# Altium PCB {TEX137}_F2837x_controlCARD_R1.3_PCB_PADS.PcbDoc (part 1 of 6)
Units mm, origin at the board's own origin, x right, y up, seen from the top; angles counter-clockwise.
Board outline 105.77 x 51.09 mm, 10 copper layers (Primary Side, Inner Layer 2, Inner Layer 3, Inner Layer 4, Inner Layer 5, Inner Layer 6, Inner Layer 7, Inner Layer 8, Inner Layer 9, Secondary Side), stack 1.634 mm thick; 292 components, 317 nets, 1400 pads, 1032 vias.
Unrouted connection lines stored in the file: 106.
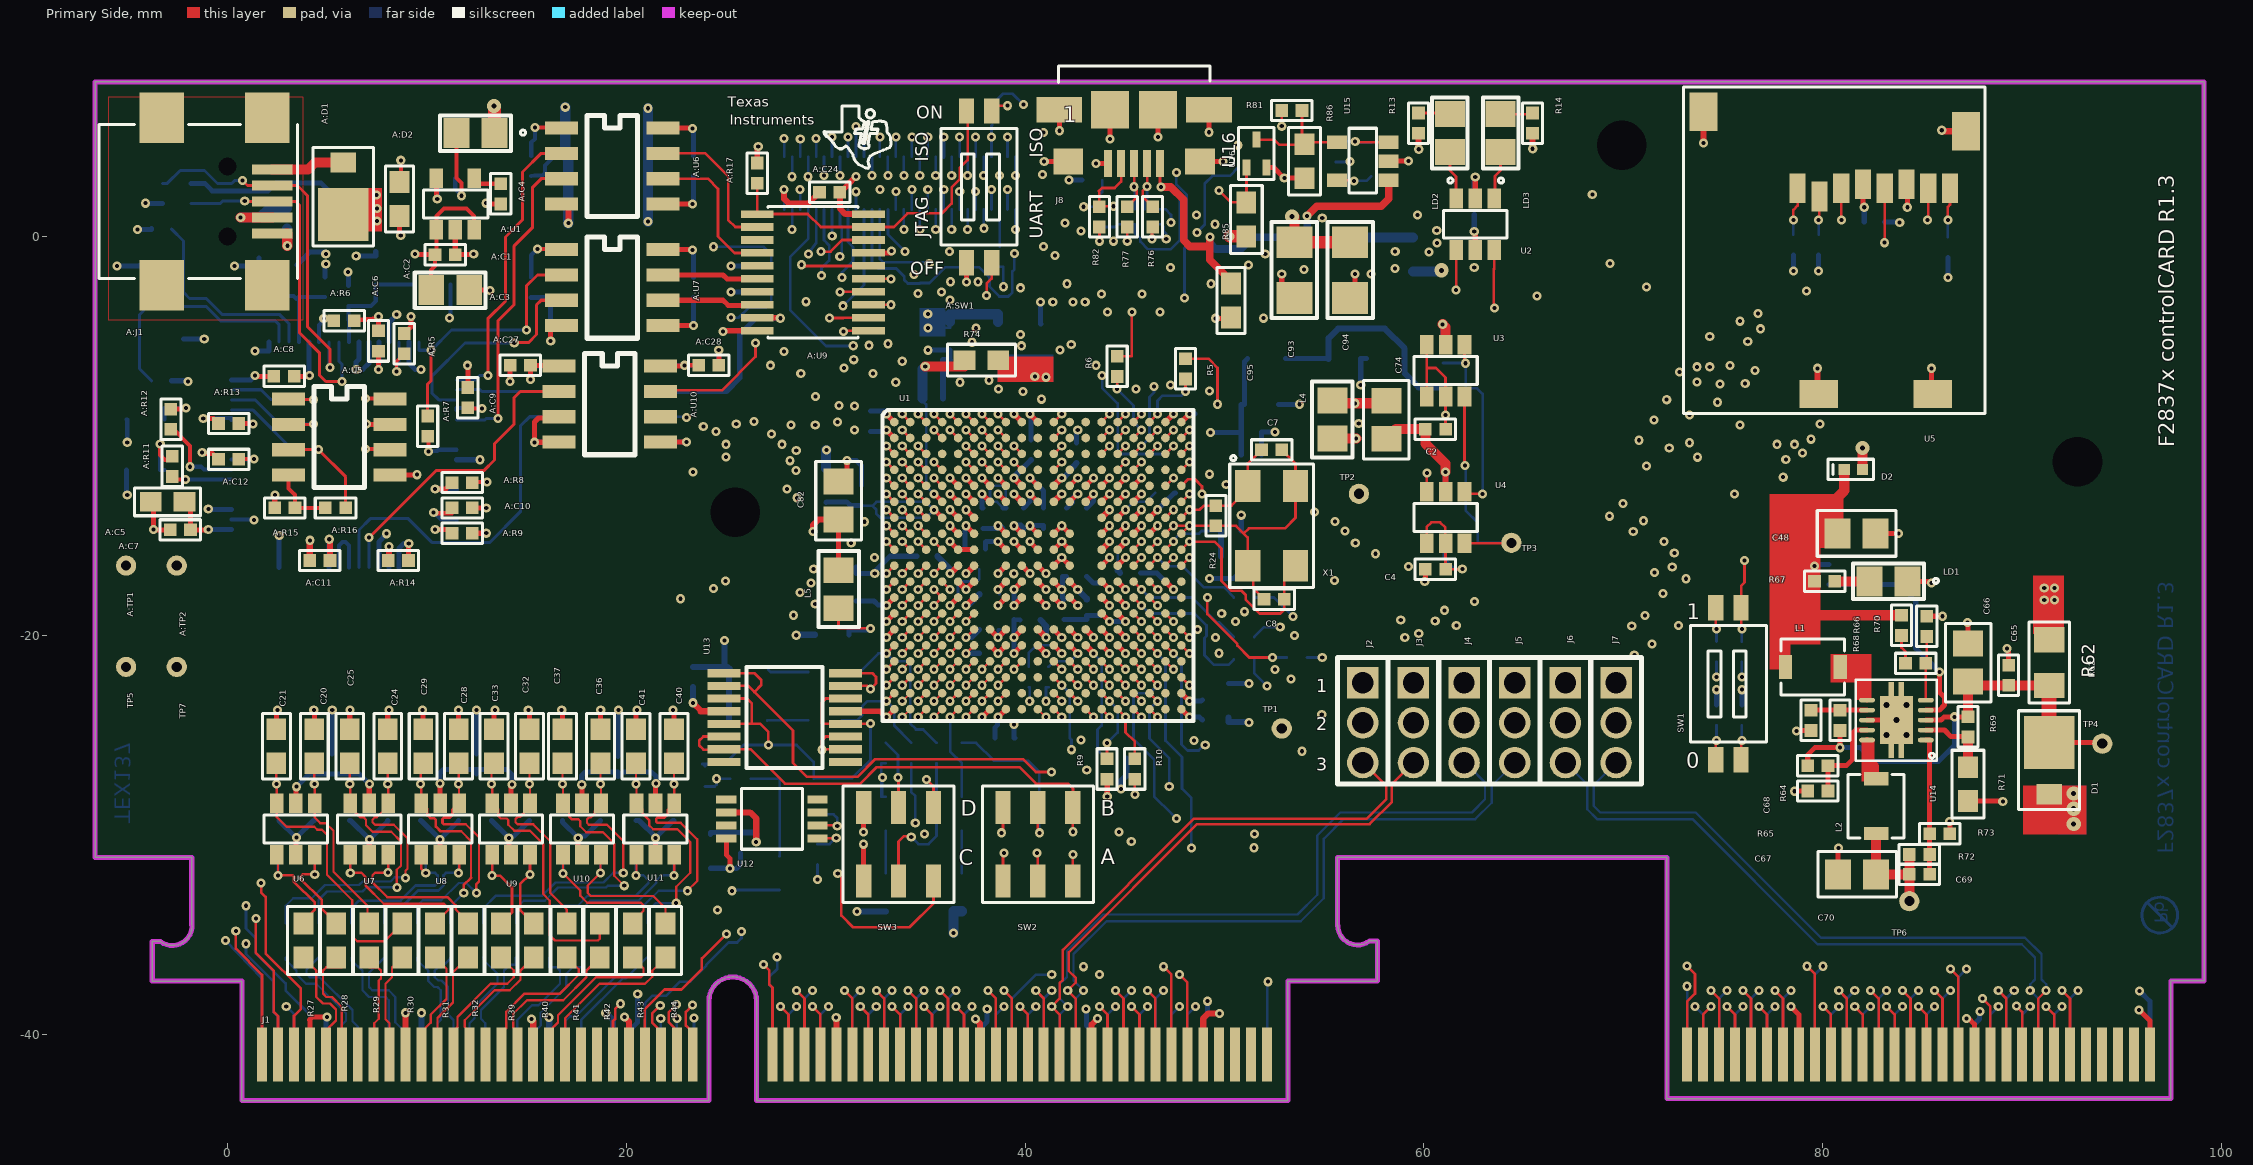
[diagram p0: Primary Side view]
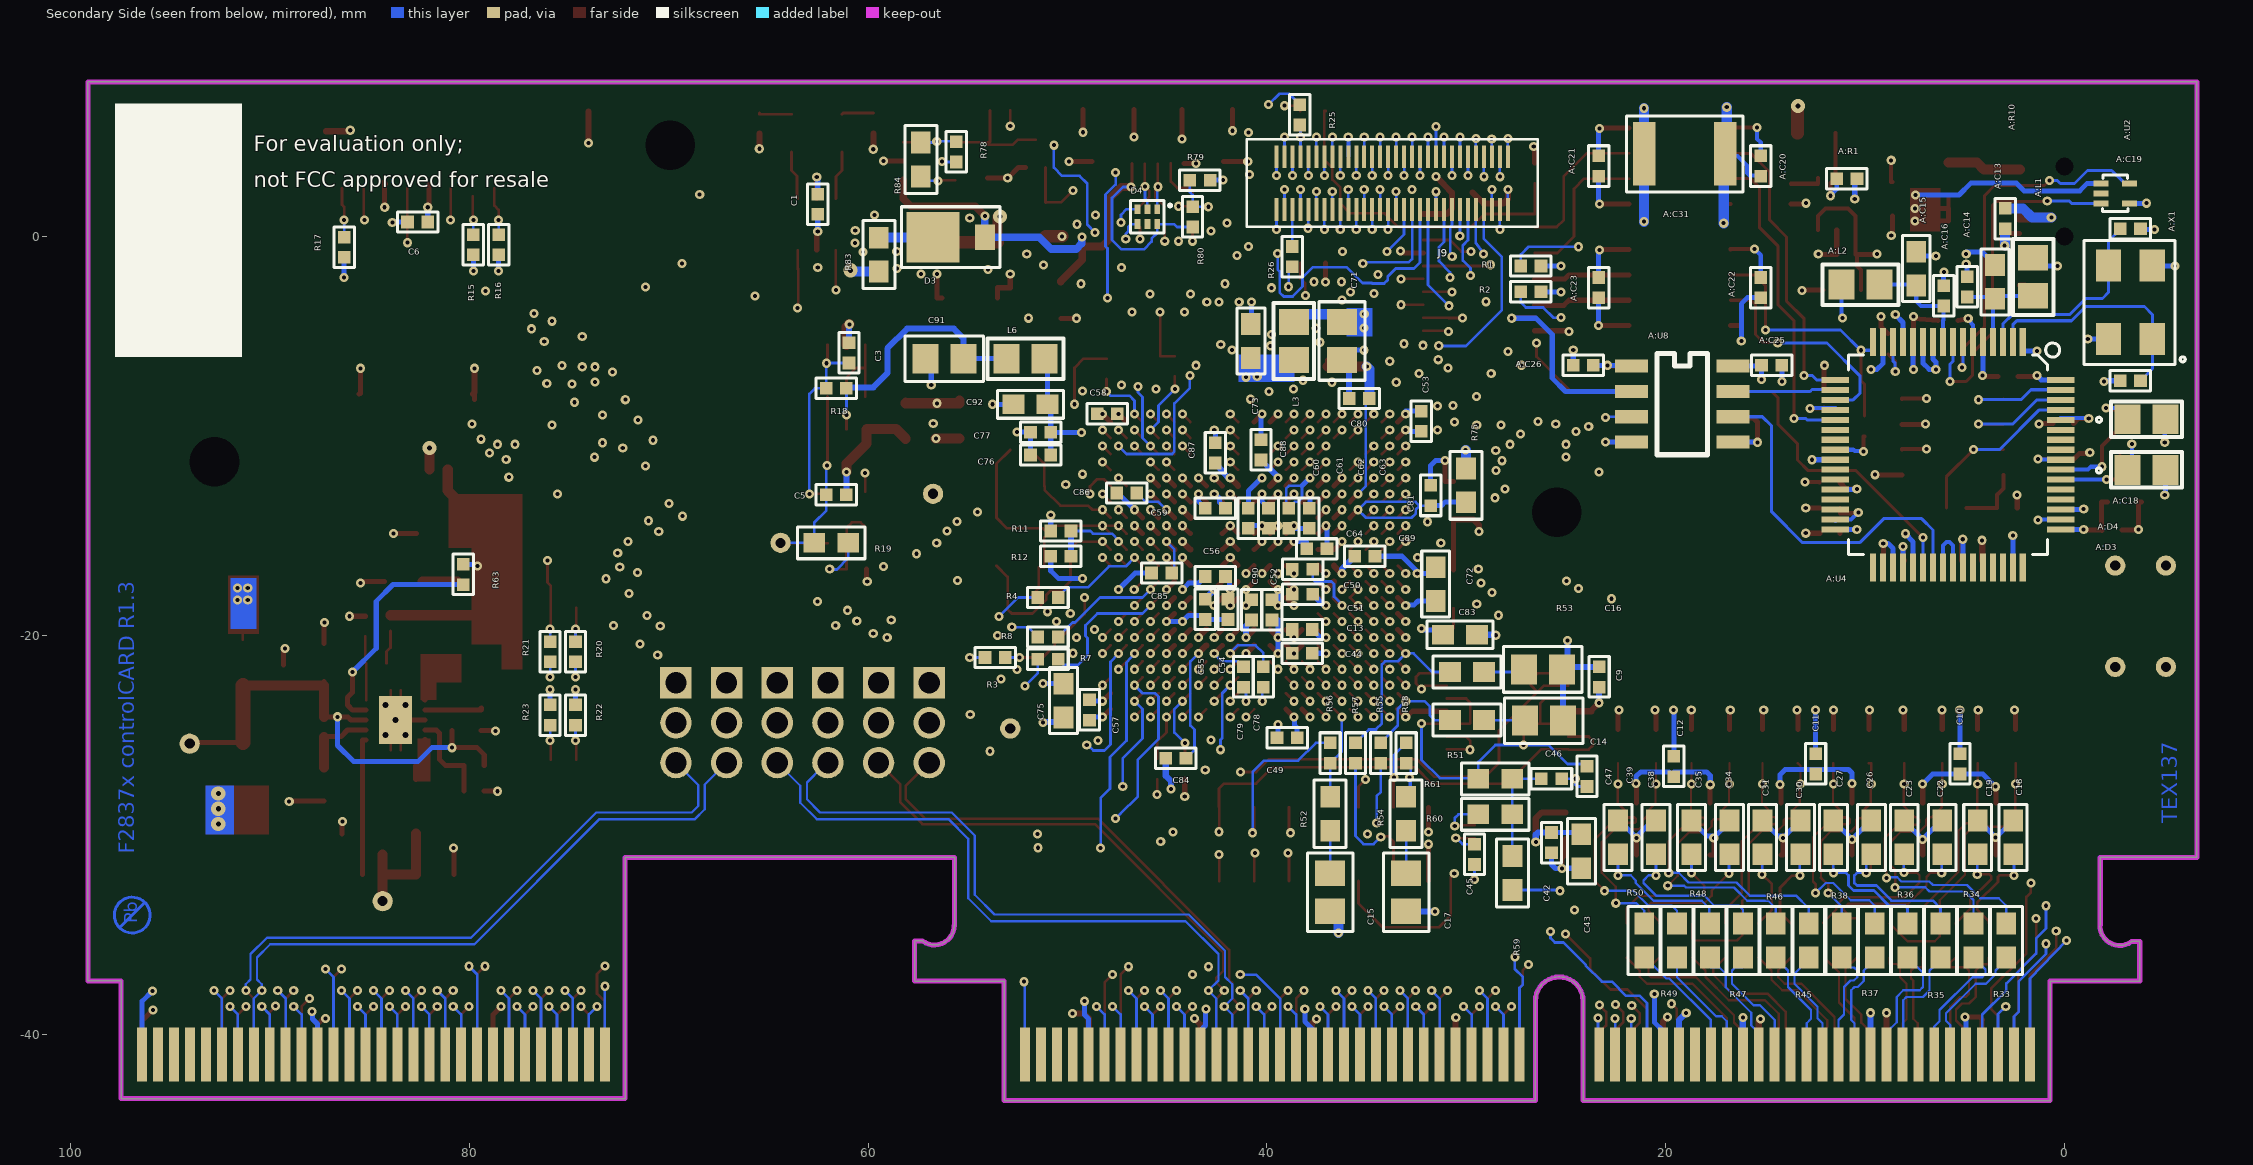
[diagram p1: Secondary Side view, seen from below]
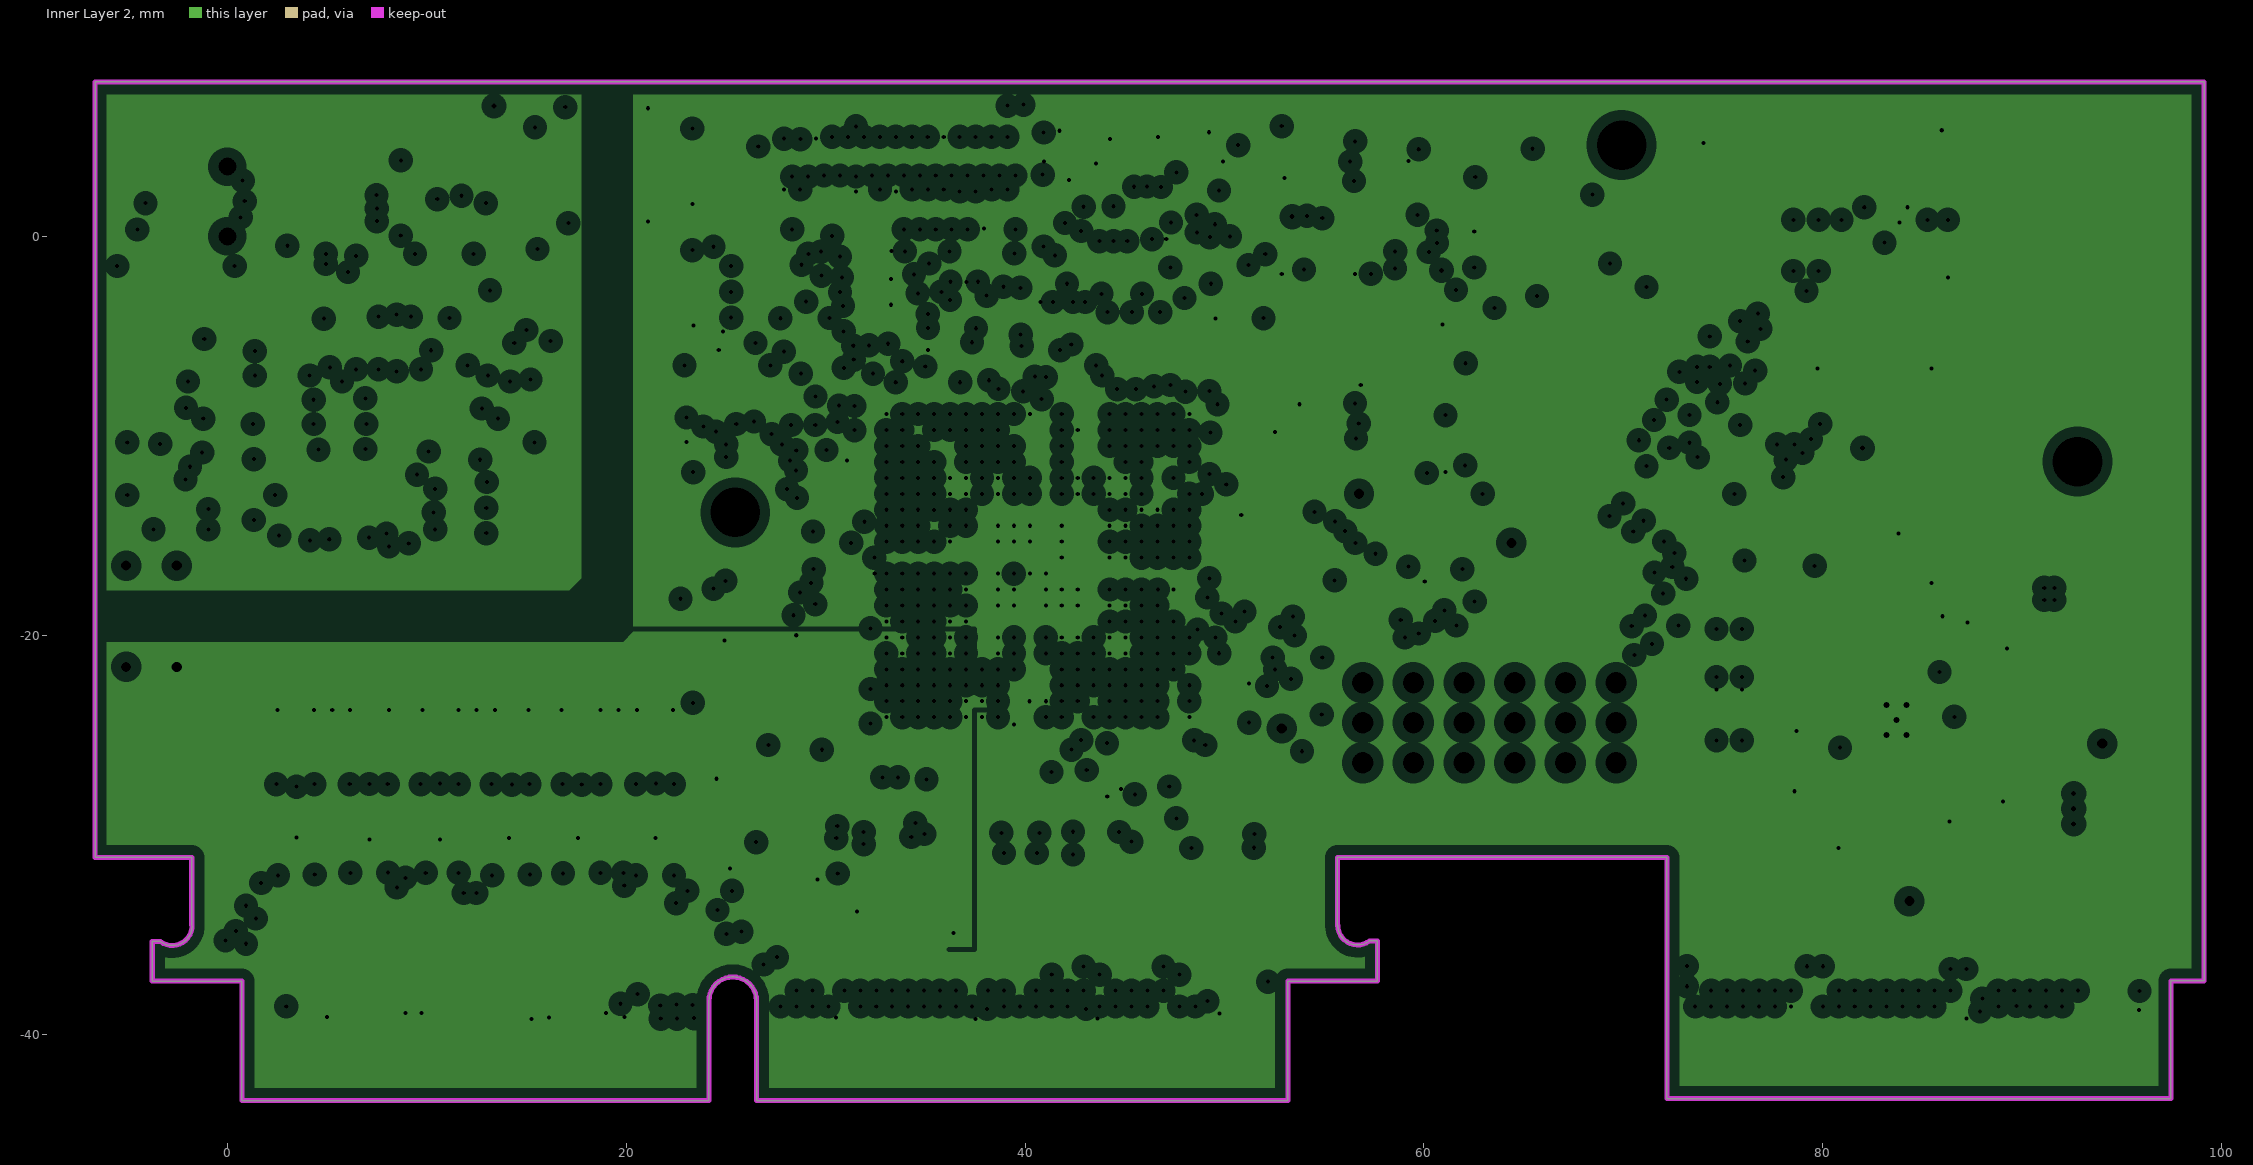
[diagram p2: Inner Layer 2, clearances drawn from the general rule]
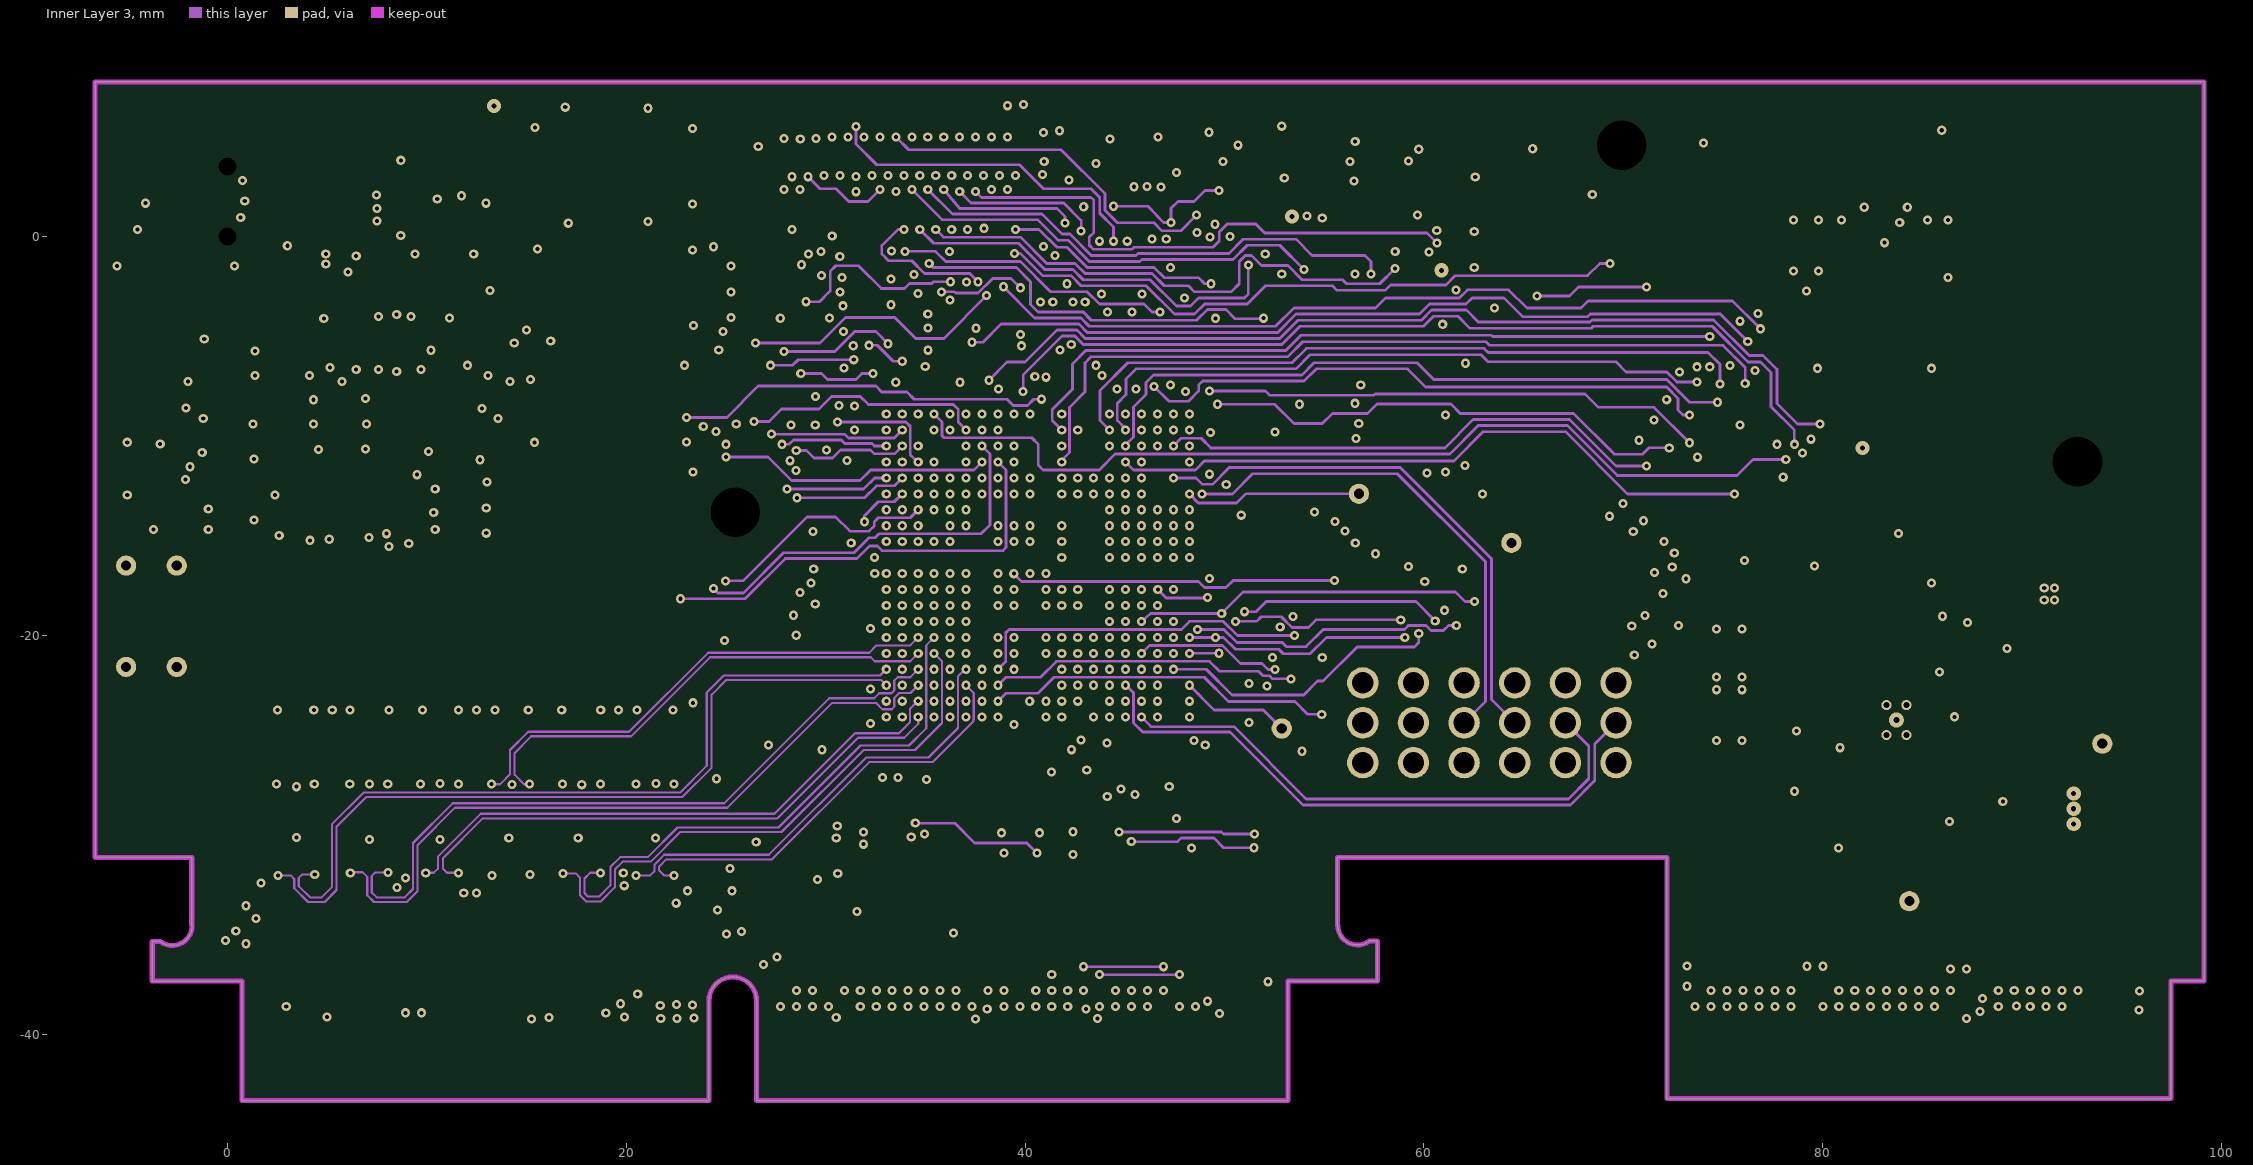
[diagram p3: Inner Layer 3]
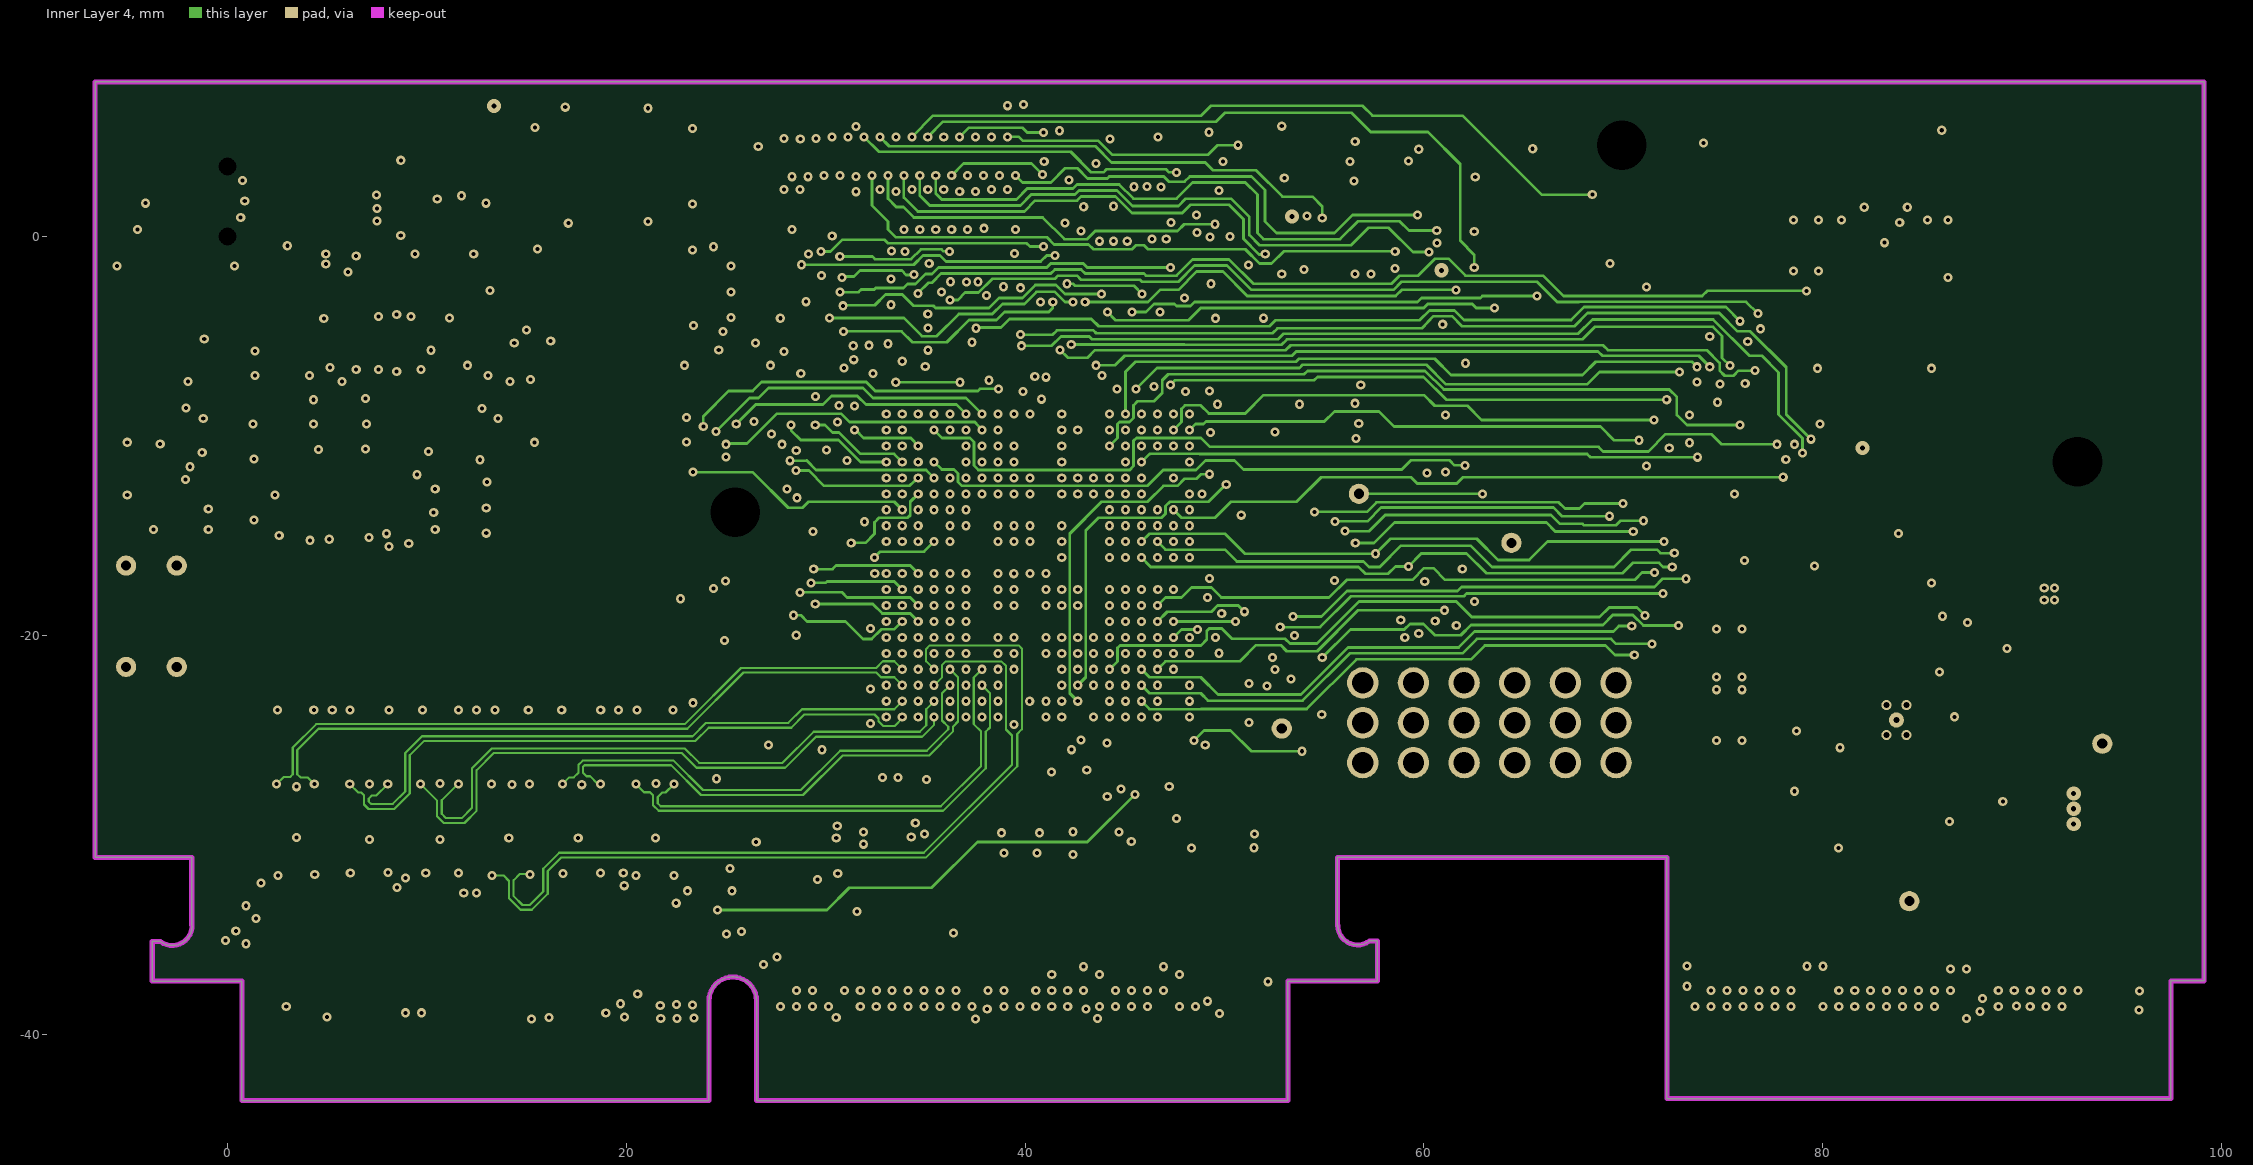
[diagram p4: Inner Layer 4]
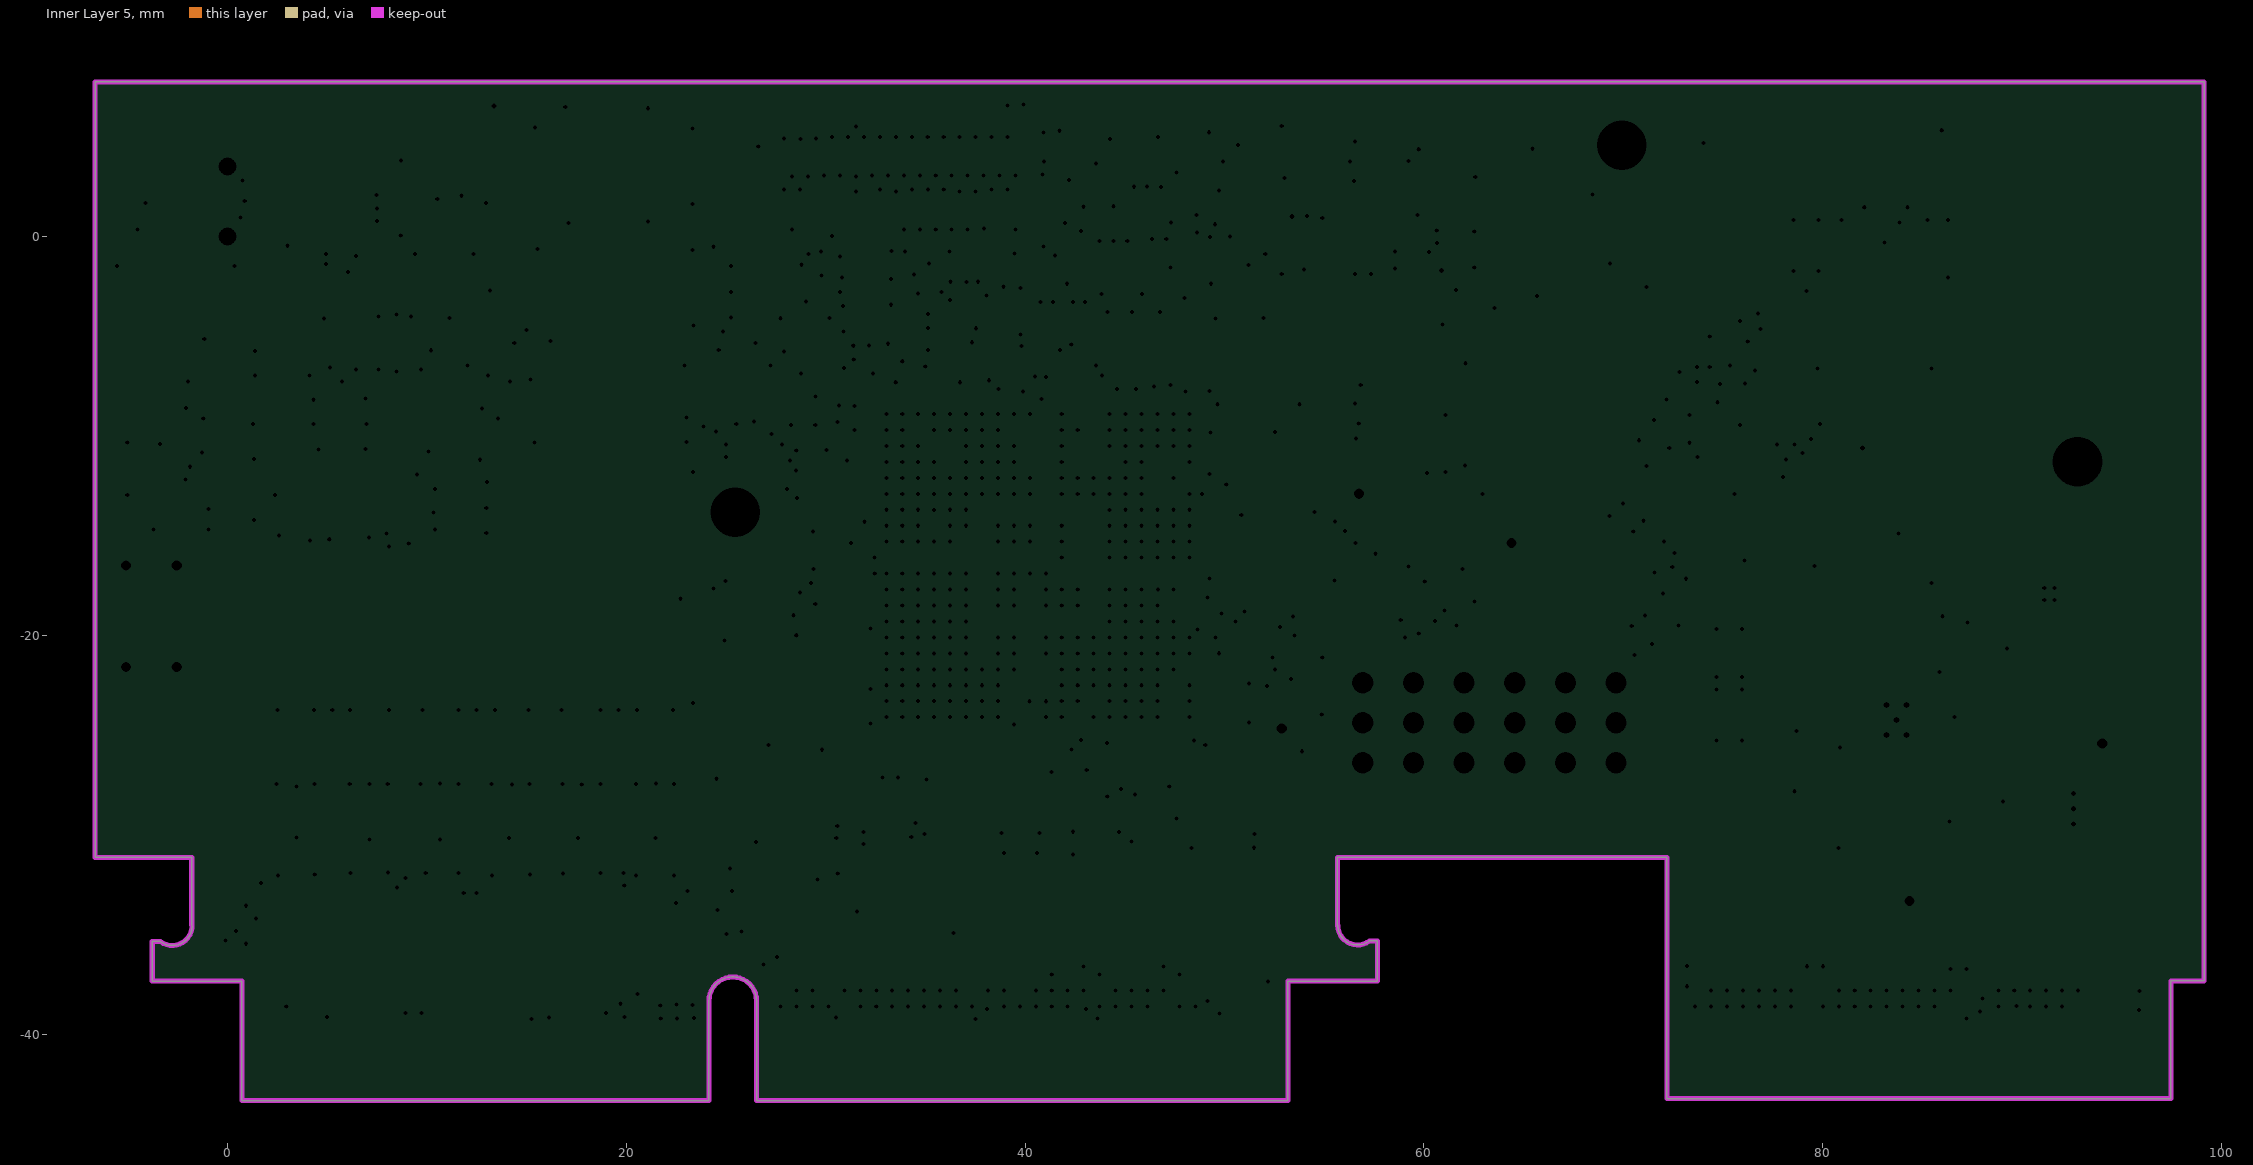
[diagram p5: Inner Layer 5, clearances drawn from the general rule]
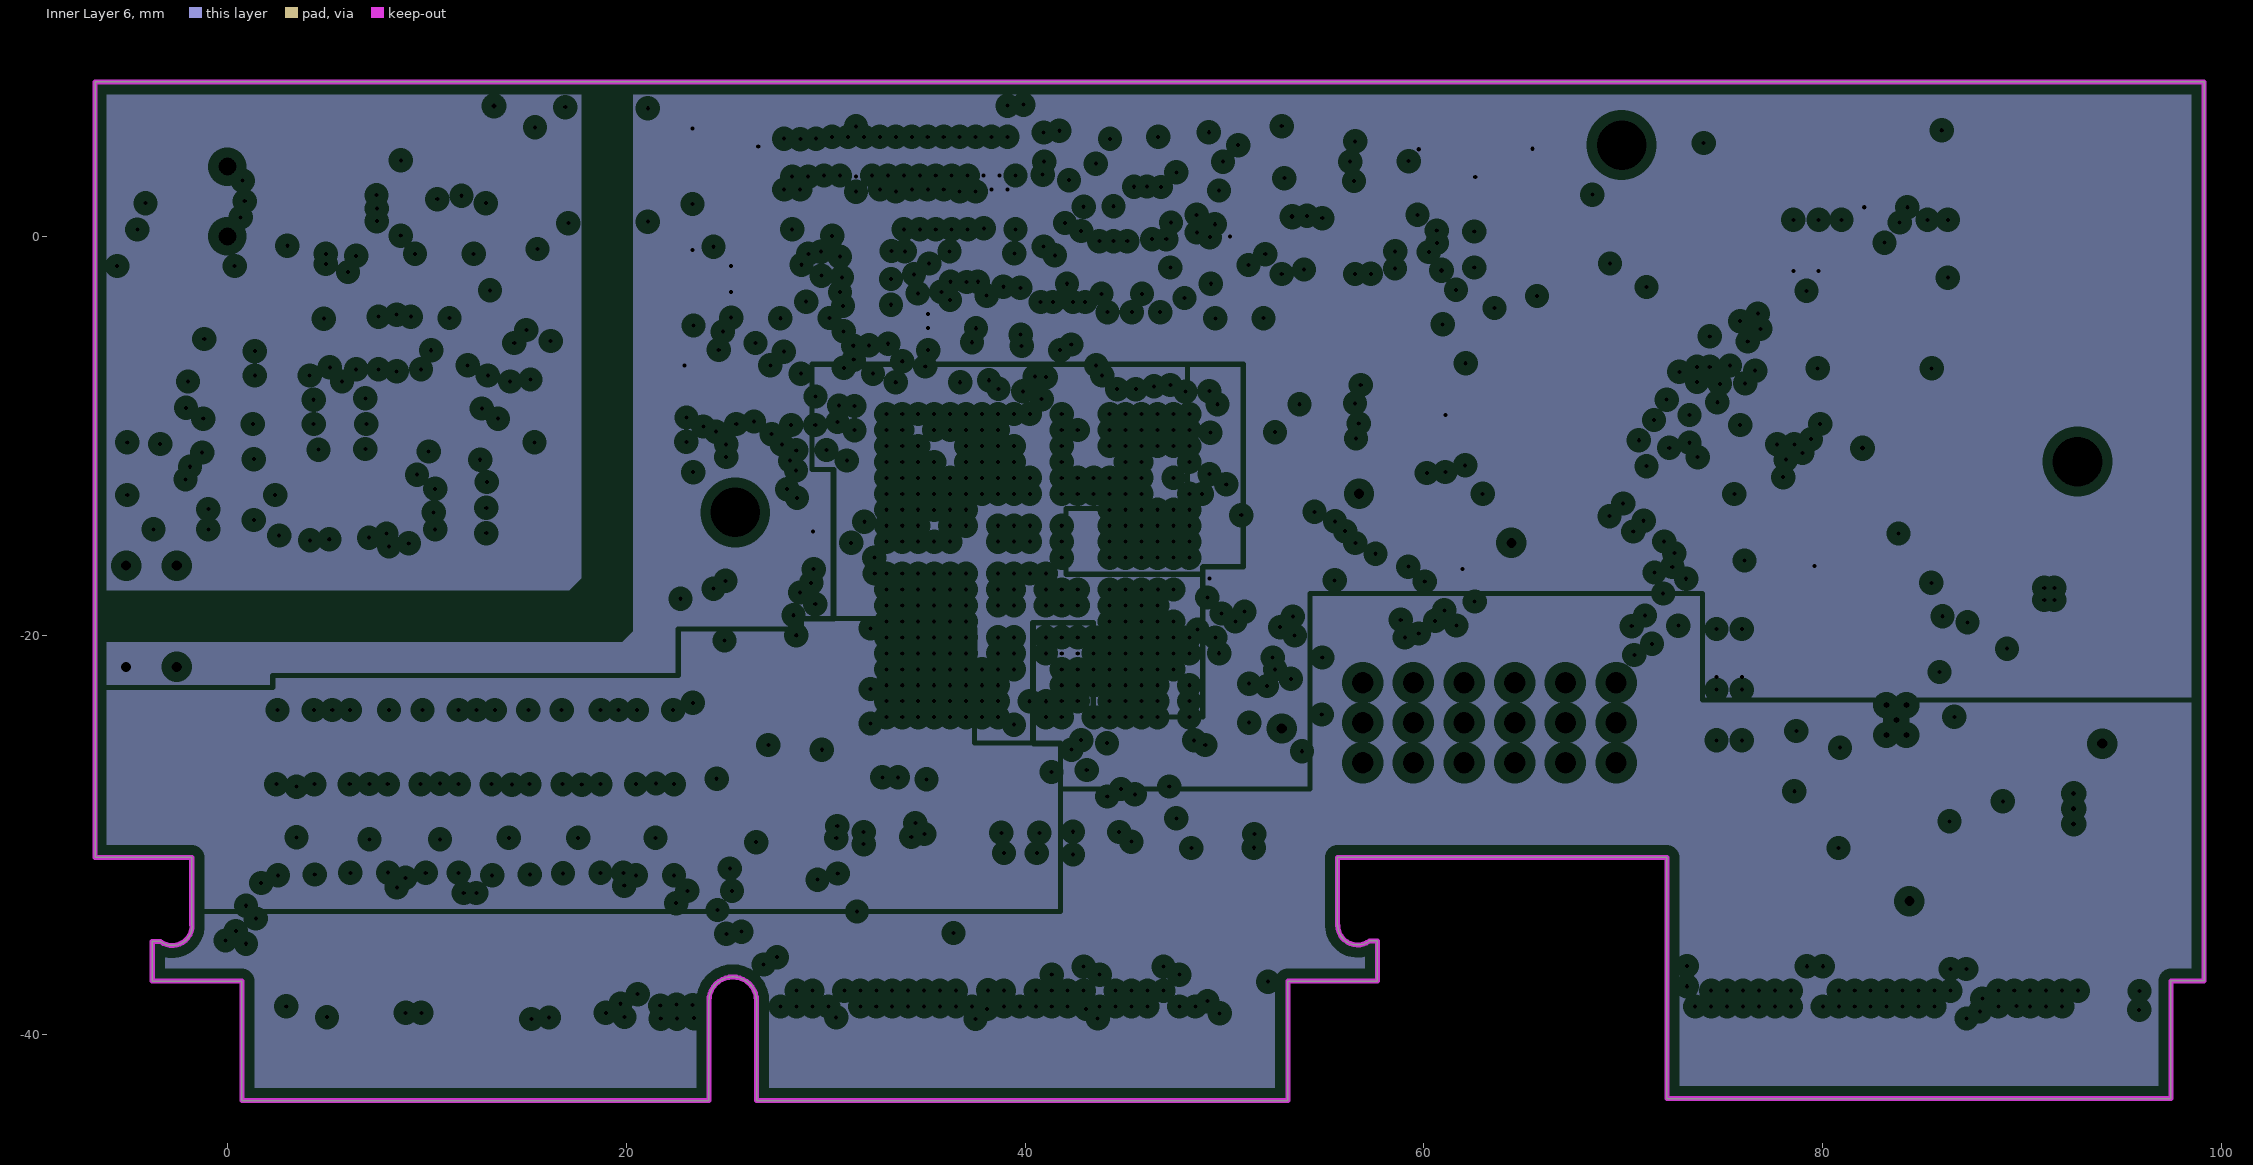
[diagram p6: Inner Layer 6, clearances drawn from the general rule]
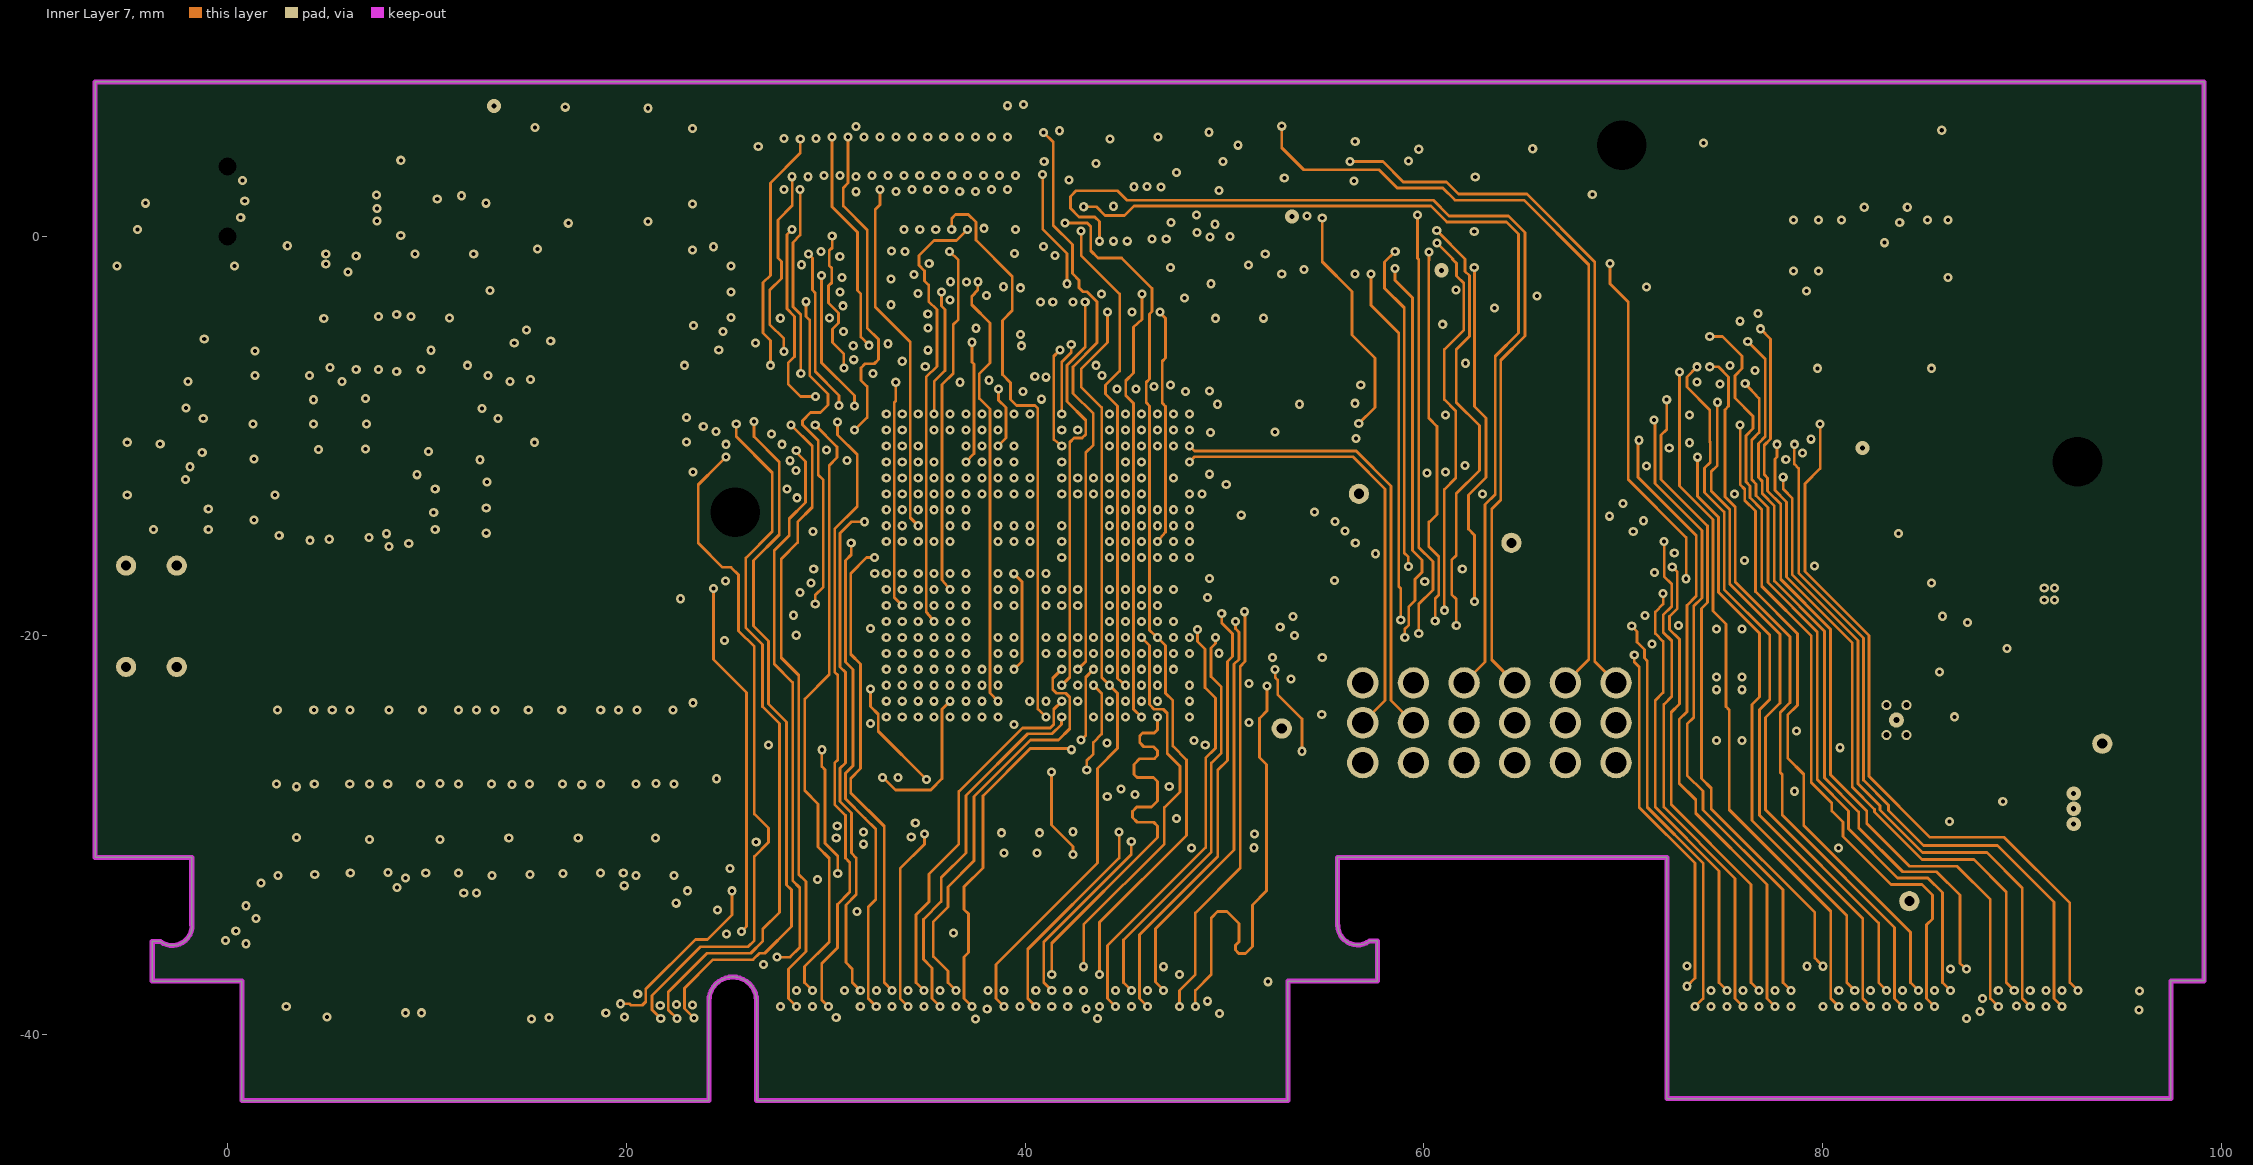
[diagram p7: Inner Layer 7]
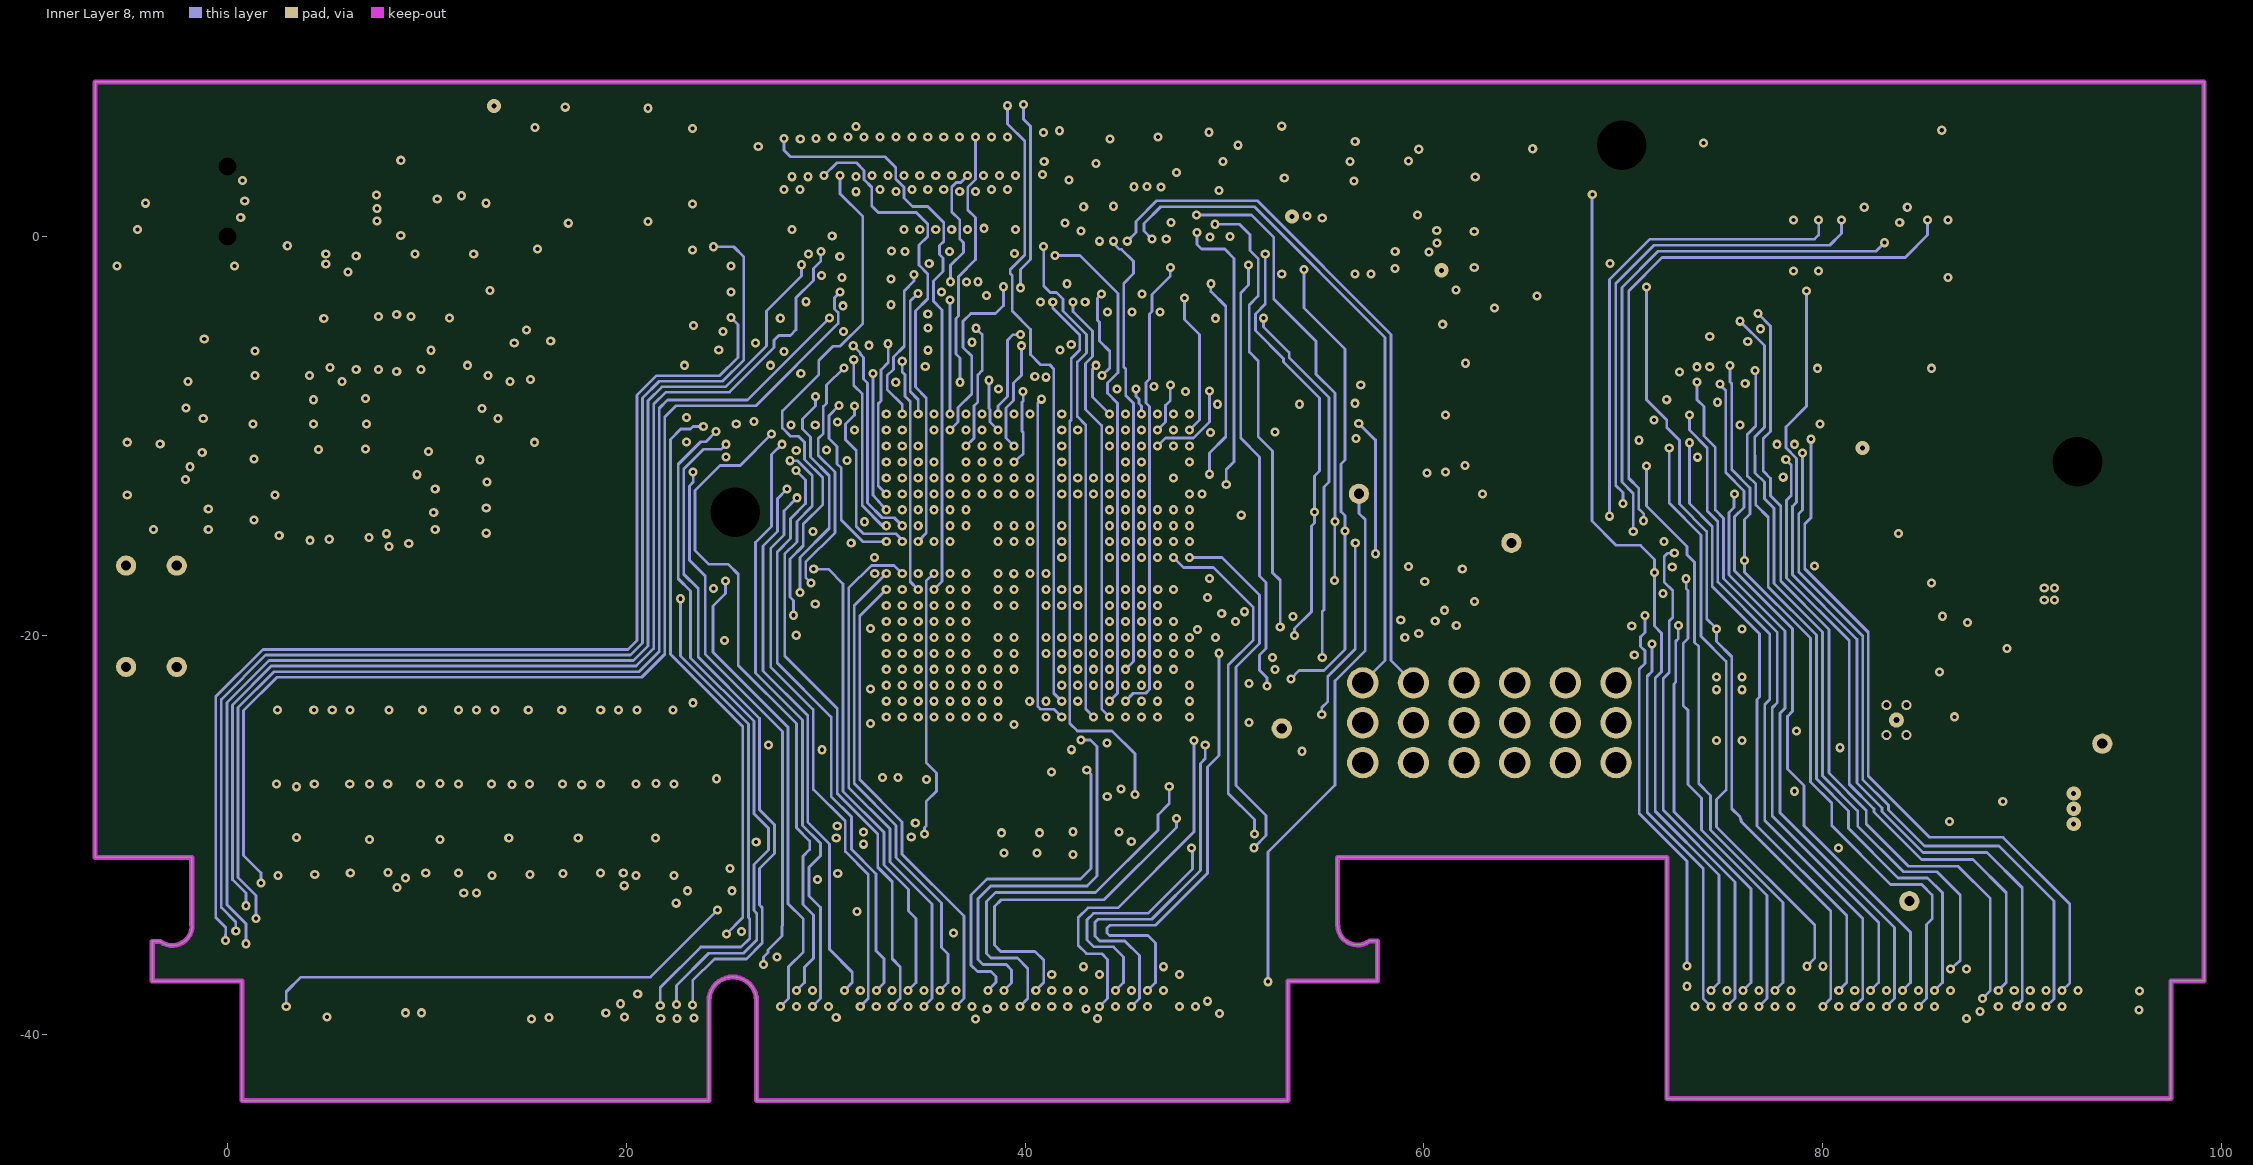
[diagram p8: Inner Layer 8]
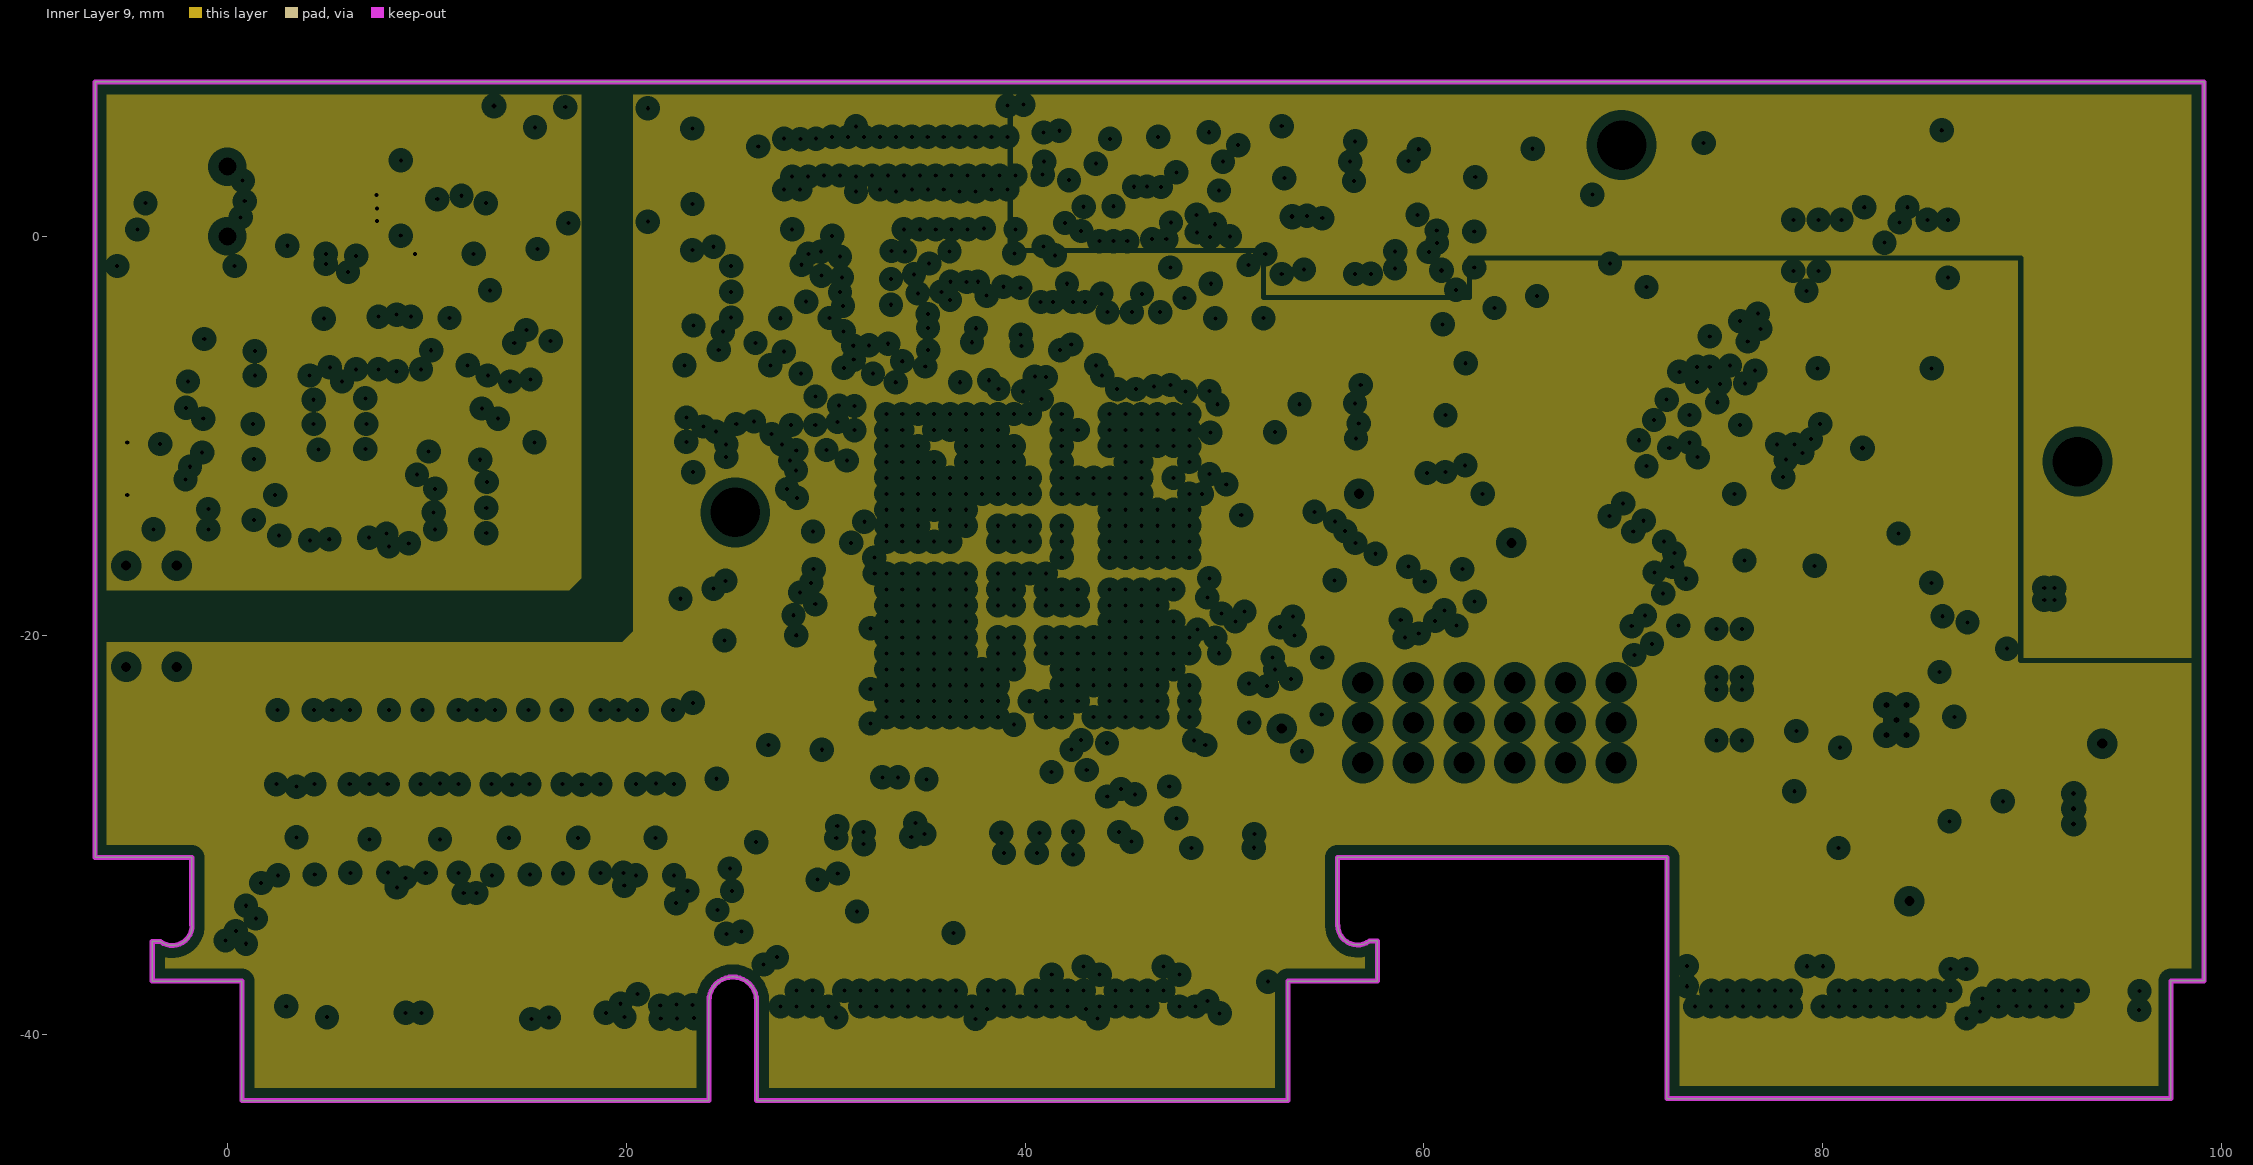
[diagram p9: Inner Layer 9, clearances drawn from the general rule]

## Layer stack, top to bottom
Primary Mask Pad Clearance: solder mask 0.0102, Solder Resist, Dk 3.5
Primary Side: signal copper 0.0343
Dielectric 1: dielectric 0.1435, FR-4, Dk 4.3
Inner Layer 2: plane copper 0.0343, net GND
Dielectric2: dielectric 0.1435, FR-4, Dk 4.3
Inner Layer 3: signal copper 0.0343
Dielectric3: dielectric 0.1435, FR-4, Dk 4.3
Inner Layer 4: signal copper 0.0343
Dielectric4: dielectric 0.1435, FR-4, Dk 4.3
Inner Layer 5: plane copper 0.0343
Dielectric5: dielectric 0.1435, FR-4, Dk 4.3
Inner Layer 6: plane copper 0.0343, net VDD_3V3
Dielectric6: dielectric 0.1435, FR-4, Dk 4.3
Inner Layer 7: signal copper 0.0343
Dielectric7: dielectric 0.1435, FR-4, Dk 4.3
Inner Layer 8: signal copper 0.0343
Dielectric8: dielectric 0.1435, FR-4, Dk 4.3
Inner Layer 9: plane copper 0.0343, net EMU_5V0
Dielectric9: dielectric 0.1435, FR-4, Dk 4.3
Secondary Side: signal copper 0.0343
Secondary Mask Pad Clearance: solder mask 0.0102, Solder Resist, Dk 3.5

## Board outline
0.725,-43.335 24.147,-43.335 24.147,-38.331 cw(c25.341,-38.331) 26.535,-38.331 26.535,-43.335 53.176,-43.335 53.176,-37.341 57.672,-37.341 57.672,-35.334 57.266,-35.334 57.267,-35.334 cw(c56.669,-34.543) 55.678,-34.547 55.666,-34.547 55.666,-32.068 55.666,-31.143 72.183,-31.143 72.183,-43.233 97.464,-43.233 97.464,-37.338 99.125,-37.338 99.125,7.752 -6.64,7.752 -6.64,-31.143 -1.789,-31.143 -1.789,-34.521 -1.776,-34.521 cw(c-2.766,-34.57) -3.364,-35.359 -3.77,-35.359 -3.77,-37.341 0.725,-37.341

## Design rules (kind name [scope] priority, off if disabled: settings)
Clearance "Clearance - Default - DEFAULT - Via" [IsVia vs IsVia] p1: gap=0.152 ignorepadtopadclearanceinfootprint=FALSE
Clearance "Clearance - Default - DEFAULT- SMD" [IsVia vs IsSMTPin] p2: gap=0.152 ignorepadtopadclearanceinfootprint=FALSE
Clearance "Clearance - Default - DEFAULT - Net" [All] p3: gap=0.203 ignorepadtopadclearanceinfootprint=FALSE except(0: Arc-Hole Track-Hole SMDPad-Hole THPad-Hole Via-Hole Fill-Hole Poly-Hole Region-Hole Text-Hole; 0.102: Arc-SMDPad Arc-THPad Arc-Via Arc-Text Track-SMDPad Track-THPad Track-Via Track-Text SMDPad-SMDPad SMDPad-THPad SMDPad-Via SMDPad-Text THPad-THPad THPad-Via THPad-Text Via-Via Via-Text Fill-Text Poly-Text Region-Text; 0.119: Arc-Arc Arc-Track Track-Track; 0.254: Text-Text)
ComponentClearance "ComponentClearance - Default - DEFAULT" [All] p1: gap=0.152 collisioncheckmode=3 verticalgap=0.254 showdistances=FALSE
FanoutControl Fanout_SOIC [IsSOIC] p1: bgadir=Out bgaviamode=Centered fanoutstyle=Auto fanoutdirection=Alternating viagrid=0.025 // Fanout_SOIC (Default Rule)
FanoutControl Fanout_BGA [IsBGA] p3: bgadir=Out bgaviamode=Centered fanoutstyle=Auto fanoutdirection=Alternating viagrid=0.025 // Fanout_BGA (Default Rule)
HoleToHoleClearance "HoleToHoleClearance - Default - DEFAULT" [All] p1: gap=0.152 allowstackedmicrovias=TRUE
Length "Default Length" [All] p1: maxlimit=1270 minlimit=0
MaxMinImpedance "Default Impedance" [All] p1: minimum=50.00 maximum=150.0
ParallelSegment "Default Parallel Segment Same Layer" [All] p1: limit=25.4 gap=5.08
ParallelSegment "Default Parallel Segment Adjasent" [All] p2: limit=25.4 gap=5.08
PlaneClearance "PlaneClearance - FootPrint 'CONN_USB_B_MINI_FEMALE'" [HasFootprint('CONN_USB_B_MINI_FEMALE')] p1: clearance=0.432 // PAD - Power Plane Clearance
PlaneClearance "PlaneClearance - FootPrint 'DF40C-60DP-0.4V'" [HasFootprint('DF40C-60DP-0.4V')] p2: clearance=1.041 // PAD - Power Plane Clearance
PlaneClearance "PlaneClearance - FootPrint 'VIA_20_40'" [HasFootprint('VIA_20_40')] p3: clearance=0.381 // PAD - Power Plane Clearance
PlaneClearance "PlaneClearance - FootPrint 'TI_DRC_10'" [HasFootprint('TI_DRC_10')] p4: clearance=0.203 // PAD - Power Plane Clearance
PlaneClearance "PlaneClearance - FootPrint 'HDR1X3_2MM'" [HasFootprint('HDR1X3_2MM')] p5: clearance=0.508 // PAD - Power Plane Clearance
PlaneConnect "PlaneConnect - FootPrint 'VIA_20_40'" [HasFootprint('VIA_20_40')] p1: planeconnectstyle=Relief reliefexpansion=0.254 reliefentries=4 reliefconductorwidth=0.381 reliefairgap=0.254
PlaneConnect "PlaneConnect - FootPrint 'TI_DRC_10'_11" [HasFootprint('TI_DRC_10')] p2: planeconnectstyle=Direct reliefexpansion=0.102 reliefentries=4 reliefconductorwidth=0.305 reliefairgap=0
PlaneConnect "PlaneConnect - FootPrint 'TI_DRC_10'" [HasFootprint('TI_DRC_10')] p3: planeconnectstyle=Direct reliefexpansion=0.102 reliefentries=4 reliefconductorwidth=0.381 reliefairgap=0
PlaneConnect "PlaneConnect - FootPrint 'HDR1X3_2MM'_7" [HasFootprint('HDR1X3_2MM')] p4: planeconnectstyle=Relief reliefexpansion=0.254 reliefentries=4 reliefconductorwidth=0.381 reliefairgap=0.191
PlaneConnect "PlaneConnect - FootPrint 'HDR1X3_2MM'" [HasFootprint('HDR1X3_2MM')] p5: planeconnectstyle=Relief reliefexpansion=0.254 reliefentries=4 reliefconductorwidth=0.381 reliefairgap=0.191
PlaneConnect "PlaneConnect - FootPrint 'TI_DRC_10'_9" [HasFootprint('TI_DRC_10')] p6: planeconnectstyle=Direct reliefexpansion=0.102 reliefentries=4 reliefconductorwidth=0.305 reliefairgap=0
PlaneConnect "PlaneConnect - FootPrint 'TI_DRC_10'_10" [HasFootprint('TI_DRC_10')] p7: planeconnectstyle=Direct reliefexpansion=0.102 reliefentries=4 reliefconductorwidth=0.305 reliefairgap=0
PlaneConnect "PlaneConnect - FootPrint 'TI_DRC_10'_8" [HasFootprint('TI_DRC_10')] p8: planeconnectstyle=Direct reliefexpansion=0.102 reliefentries=4 reliefconductorwidth=0.305 reliefairgap=0
PlaneConnect "Default PlaneConnect" [All] p9: planeconnectstyle=Direct reliefexpansion=0.508 reliefentries=4 reliefconductorwidth=0.381 reliefairgap=0.254
PolygonConnect "PolygonConnect - FootPrint 'VIA_20_40'" [HasFootprint('VIA_20_40')] p1: connectstyle=Relief reliefconductorwidth=0.381 reliefentries=4 polygonreliefangle="45 Angle" airgapwidth=0.254
PolygonConnect "PolygonConnect - FootPrint 'TI_DRC_10'_6" [HasFootprint('TI_DRC_10')] p2: connectstyle=Direct reliefconductorwidth=0.305 reliefentries=4 polygonreliefangle="45 Angle" airgapwidth=0.254
PolygonConnect "PolygonConnect - FootPrint 'TI_DRC_10'_5" [HasFootprint('TI_DRC_10')] p3: connectstyle=Direct reliefconductorwidth=0.305 reliefentries=4 polygonreliefangle="45 Angle" airgapwidth=0.254
PolygonConnect "PolygonConnect - FootPrint 'HDR1X3_2MM'_2" [HasFootprint('HDR1X3_2MM')] p4: connectstyle=Relief reliefconductorwidth=0.381 reliefentries=4 polygonreliefangle="45 Angle" airgapwidth=0.191
PolygonConnect "PolygonConnect - FootPrint 'HDR1X3_2MM'" [HasFootprint('HDR1X3_2MM')] p5: connectstyle=Relief reliefconductorwidth=0.381 reliefentries=4 polygonreliefangle="45 Angle" airgapwidth=0.191
PolygonConnect "PolygonConnect - Default SMT" [IsSMTPin] p6: connectstyle=Relief reliefconductorwidth=0.254 reliefentries=4 polygonreliefangle="45 Angle" airgapwidth=0.254
PolygonConnect "PolygonConnect - FootPrint 'TI_DRC_10'_4" [HasFootprint('TI_DRC_10')] p7: connectstyle=Direct reliefconductorwidth=0.305 reliefentries=4 polygonreliefangle="45 Angle" airgapwidth=0.254
PolygonConnect "PolygonConnect - FootPrint 'TI_DRC_10'_3" [HasFootprint('TI_DRC_10')] p8: connectstyle=Direct reliefconductorwidth=0.305 reliefentries=4 polygonreliefangle="45 Angle" airgapwidth=0.254
PolygonConnect "PolygonConnect - FootPrint 'TI_DRC_10'" [HasFootprint('TI_DRC_10')] p9: connectstyle=Direct reliefconductorwidth=0.381 reliefentries=4 polygonreliefangle="45 Angle" airgapwidth=0.254
PolygonConnect "PolygonConnect - Default Pad" [All] p10: connectstyle=Direct reliefconductorwidth=0.381 reliefentries=4 polygonreliefangle="45 Angle" airgapwidth=0.254
RoomDefinition "Room: DRW9723688" [All vs False] p1: confinementstyle=ConfineOut formatcopy=TRUE lockcomponents=FALSE outline 29.151,-15.9 ccw(c25.341,-15.9) 25.341,-12.09 ccw(c25.341,-15.9) 21.531,-15.9 ccw(c25.341,-15.9) 25.341,-19.71 ccw(c25.341,-15.9)
RoomDefinition "Room: DRW32993563" [All vs False] p2: confinementstyle=ConfineOut formatcopy=TRUE lockcomponents=FALSE outline 75.971,-15.9 ccw(c72.161,-15.9) 72.161,-12.09 ccw(c72.161,-15.9) 68.351,-15.9 ccw(c72.161,-15.9) 72.161,-19.71 ccw(c72.161,-15.9)
RoutingLayers "RoutingLayers - Default - DEFAULT" [All] p1: top layer_v5=TRUE mid layer 1_v5=TRUE mid layer 2_v5=TRUE mid layer 3_v5=TRUE mid layer 4_v5=TRUE bottom layer_v5=TRUE
RoutingPriority "RoutingPriority - Default - DEFAULT" [All] p1: routingpriority=3
RoutingTopology "Default Routing Topology" [All] p1: topology=Shortest
RoutingVias "RoutingVias - Default - DEFAULT" [All] p1: holewidth=0.33 width=0.762 viastyle="Through Hole" minholewidth=0.33 minwidth=0.762 maxholewidth=0.33 maxwidth=0.762
SMDToCorner "SMDToCorner - Default - DEFAULT" [All] p1: distance=60000
SolderMaskExpansion [All] p1: expansion=0.102 istentingtop=FALSE
Width "Default Width" [All] p1: maxlimit=5.08 minlimit=0.102 preferedwidth=0.135
21 further rules are at their usual default settings.

## Components (designator, comment, footprint, x,y, rotation, side; value= is the part's Value field where it differs from the comment)
A:C1 "C0402" C0402 10.917,-0.917 r180 top
A:C2 "C0603" C0603 8.631,1.877 r90 top
A:C3 "C0805P" C0805P 11.171,-2.695 r0 top
A:C4 "C0402" C0402 13.711,2.131 r90 top
A:C5 "C0603" C0603 -2.997,-13.31 r0 top
A:C6 "C0402" C0402 7.575,-5.245 r270 top
A:C7 "C0402" C0402 -2.361,-14.717 r0 top
A:C8 "C0402" C0402 2.839,-7.017 r180 top
A:C9 "C0402" C0402 12.057,-8.083 r270 top
A:C10 "C0402" C0402 11.771,-13.617 r180 top
A:C11 "C0402" C0402 4.637,-16.251 r0 top
A:C12 "C0402" C0402 0.057,-11.183 r0 top
A:C13 "C0603" C0603 3.487,-2.281 r270 bottom
A:C14 "C0402" C0402 4.884,-2.535 r270 bottom
A:C15 "C0603" C0603 7.439,-1.617 r270 bottom
A:C16 "C0402" C0402 6.063,-2.98 r270 bottom
A:C18 "C0402" C0402 -3.302,-7.239 r180 bottom
A:C19 "C0402" C0402 -3.302,0.381 r0 bottom
A:C20 "C0402" C0402 15.235,3.528 r90 bottom
A:C21 "C0402" C0402 23.363,3.528 r90 bottom
A:C22 "C0402" C0402 15.235,-2.568 r90 bottom
A:C23 "C0402" C0402 23.363,-2.568 r90 bottom
A:C24 "C0402" C0402 30.201,2.21 r0 top
A:C25 "C0402" C0402 14.687,-6.465 r0 bottom
A:C26 "C0402" C0402 24.136,-6.465 r180 bottom
A:C27 "C0402" C0402 14.687,-6.465 r0 top
A:C28 "C0402" C0402 24.136,-6.465 r180 top
A:C31 "C1812" C1812 19.05,4.14 r90 bottom
A:D1 "DO-216AA" DO-216AA 5.812,1.414 r180 top
A:D2 "LED0805" LED0805 12.441,5.179 r180 top
A:D3 "LED0805" LED0805 -4.104,-11.712 r180 bottom
A:D4 "LED0805" LED0805 -4.104,-9.172 r180 bottom
A:J1 "CONN_USB_B_MINI_FEMALE" CONN_USB_B_MINI_FEMALE 2.25,1.75 r270 top
A:L1 "L0805" L0805 1.582,-2.027 r270 bottom
A:L2 "L0805" L0805 10.239,-2.418 r180 bottom
A:R1 "R0402" R0402 10.917,2.893 r0 bottom
A:R5 "R0402" R0402 8.863,-5.38 r270 top
A:R6 "R0402" R0402 5.848,-4.229 r180 top
A:R7 "R0402" R0402 10.039,-9.517 r90 top
A:R8 "R0402" R0402 11.771,-12.347 r0 top
A:R9 "R0402" R0402 11.771,-14.887 r0 top
A:R10 "R0402" R0402 2.979,0.894 r90 bottom
A:R11 "R0402" R0402 -2.769,-11.532 r90 top
A:R12 "R0402" R0402 -2.834,-9.172 r90 top
A:R13 "R0402" R0402 0.062,-9.381 r0 top
A:R14 "R0402" R0402 8.574,-16.251 r0 top
A:R15 "R0402" R0402 2.881,-13.617 r0 top
A:R16 "R0402" R0402 5.421,-13.617 r0 top
A:R17 "R0402" R0402 26.568,3.175 r90 top
A:SW1 "SW_2POS_CTS218" SW_2POS_CTS218 37.69,2.48 r0 top
A:TP1 "VIA_20_40" VIA_20_40 -5.08,-16.51 r90 top
A:TP2 "VIA_20_40" VIA_20_40 -2.54,-16.51 r90 top
A:U1 "SOT-23-5" SOT-23-5 11.425,1.623 r0 top
A:U2 "SOT-553-5" SOT-553-5 -2.54,2.159 r90 bottom
A:U4 "QFN-64" QFN-64 5.847,-10.95 r270 bottom
A:U5 "SOIC-8" SOIC-8 5.609,-10.061 r0 top
A:U6 "SOIC-8" SOIC-8 19.299,3.528 r0 top
A:U7 "SOIC-8" SOIC-8 19.299,-2.568 r0 top
A:U8 "SOIC-8" SOIC-8 19.172,-8.41 r180 bottom
A:U9 "TSSOP20_PW" TSSOP20_PW 29.364,-1.806 r0 top
A:U10 "SOIC-8" SOIC-8 19.177,-8.41 r0 top
A:X1 "OSC_ECS-120-20-30B" OSC_ECS-120-20-30B -3.302,-3.302 r90 bottom
C1 "C0402" C0402 62.523,1.612 r90 bottom
C2 "C0402" C0402 60.579,-9.677 r0 top
C3 "C0402" C0402 60.96,-5.842 r270 bottom
C4 "C0402" C0402 60.579,-16.688 r0 top
C5 "C0402" C0402 61.595,-12.954 r0 bottom
C6 "C0402" C0402 82.589,0.723 r180 bottom
C7 "C0402" C0402 52.363,-10.707 r180 top
C8 "C0402" C0402 52.49,-18.2 r0 top
C9 "C0402" C0402 23.341,-22.094 r270 bottom
C10 "C0402" C0402 5.246,-26.455 r270 bottom
C11 "C0402" C0402 12.485,-26.455 r270 bottom
C12 "C0402" C0402 19.597,-26.582 r270 bottom
C13 "C0402" C0402 38.227,-19.71 r180 bottom
C14 "C0805" C0805 26.111,-24.282 r0 bottom
C15 "C0805" C0805 36.83,-32.893 r90 bottom
C16 "C0805" C0805 26.162,-21.717 r0 bottom
C17 "C0805" C0805 33.02,-32.893 r90 bottom
C18 "C0603" C0603 2.579,-30.138 r270 bottom
C19 "C0603" C0603 4.357,-30.138 r270 bottom
C20 "C0603" C0603 4.357,-25.566 r270 top
C21 "C0603" C0603 2.452,-25.566 r270 top
C22 "C0603" C0603 6.135,-30.138 r270 bottom
C23 "C0603" C0603 8.04,-30.138 r270 bottom
C24 "C0603" C0603 8.04,-25.566 r270 top
C25 "C0603" C0603 6.135,-25.566 r270 top
C26 "C0603" C0603 9.691,-30.138 r270 bottom
C27 "C0603" C0603 11.596,-30.138 r270 bottom
C28 "C0603" C0603 11.596,-25.566 r270 top
C29 "C0603" C0603 9.818,-25.566 r270 top
C30 "C0603" C0603 13.247,-30.138 r270 bottom
C31 "C0603" C0603 15.152,-30.138 r270 bottom
C32 "C0603" C0603 15.152,-25.566 r270 top
C33 "C0603" C0603 13.374,-25.566 r270 top
C34 "C0603" C0603 16.803,-30.138 r270 bottom
C35 "C0603" C0603 18.708,-30.138 r270 bottom
C36 "C0603" C0603 18.708,-25.566 r270 top
C37 "C0603" C0603 16.803,-25.566 r270 top
C38 "C0603" C0603 20.486,-30.138 r270 bottom
C39 "C0603" C0603 22.391,-30.138 r270 bottom
C40 "C0603" C0603 22.391,-25.566 r270 top
C41 "C0603" C0603 20.486,-25.566 r270 top
C42 "C0402" C0402 25.73,-30.404 r270 bottom
C43 "C0603" C0603 24.232,-30.836 r270 bottom
C44 "C0402" C0402 38.227,-20.904 r180 bottom
C45 "C0402" C0402 29.591,-30.988 r90 bottom
C46 "C0402" C0402 25.73,-27.203 r0 bottom
C47 "C0402" C0402 23.952,-27.076 r90 bottom
C48 "C0805" C0805 81.694,-14.898 r180 top
C49 "C0402" C0402 38.989,-25.146 r0 bottom
C50 "C0402" C0402 38.214,-16.688 r0 bottom
C51 "C0402" C0402 38.214,-17.945 r0 bottom
C52 "C0402" C0402 39.748,-18.732 r90 bottom
C53 "C0402" C0402 32.258,-9.271 r90 bottom
C54 "C0402" C0402 41.949,-18.708 r90 bottom
C55 "C0402" C0402 43.092,-18.708 r90 bottom
C56 "C0402" C0402 42.584,-17.057 r180 bottom
C57 "C0402" C0402 48.895,-23.749 r270 bottom
C58 "C0402" C0402 48.006,-8.89 r0 bottom
C59 "C0402" C0402 42.584,-13.628 r180 bottom
C60 "C0402" C0402 40.933,-14.136 r270 bottom
C61 "C0402" C0402 39.917,-14.136 r270 bottom
C62 "C0402" C0402 38.901,-14.136 r270 bottom
C63 "C0402" C0402 37.885,-14.136 r270 bottom
C64 "C0402" C0402 37.498,-15.671 r0 bottom
C65 "C0402" C0402 89.32,-22.01 r270 top
C66 "C0805" C0805 87.288,-21.375 r270 top
C67 "C0402" C0402 79.756,-27.813 r0 top
C68 "C0402" C0402 79.414,-24.269 r90 top
C69 "C0402" C0402 84.85,-31.991 r180 top
C70 "C0805" C0805 81.725,-31.991 r0 top
C71 "C0805" C0805 36.234,-5.246 r90 bottom
C72 "C0603" C0603 31.535,-17.438 r270 bottom
C73 "C0603" C0603 40.806,-5.246 r270 bottom
C74 "C0805" C0805 58.115,-9.195 r90 top
C75 "C0603" C0603 50.204,-23.28 r270 bottom
C76 "C0402" C0402 51.347,-10.961 r180 bottom
C77 "C0402" C0402 51.347,-9.818 r180 bottom
C78 "C0402" C0402 40.181,-22.094 r90 bottom
C79 "C0402" C0402 41.172,-22.094 r90 bottom
C80 "C0402" C0402 35.37,-8.128 r180 bottom
C81 "C0402" C0402 31.789,-12.993 r270 bottom
C82 "C0805" C0805 30.646,-13.247 r270 top
C83 "C0603" C0603 30.315,-19.977 r0 bottom
C84 "C0402" C0402 44.565,-26.174 r180 bottom
C85 "C0402" C0402 45.276,-16.879 r180 bottom
C86 "C0402" C0402 47.029,-12.866 r180 bottom
C87 "C0402" C0402 42.584,-10.859 r270 bottom
C88 "C0402" C0402 40.298,-10.707 r270 bottom
C89 "C0402" C0402 35.091,-16.041 r0 bottom
C90 "C0402" C0402 40.772,-18.732 r270 bottom
C91 "C0805" C0805 56.173,-6.135 r180 bottom
C92 "C0603" C0603 51.855,-8.421 r180 bottom
C93 "C1206P" C1206P 53.506,-1.69 r270 top
C94 "C1206P" C1206P 56.3,-1.69 r270 top
C95 "C0603" C0603 50.331,-3.214 r90 top
D1 "DO-216AA" DO-216AA 91.352,-25.693 r0 top
D2 "SOD882L" SOD882L 81.534,-11.684 r0 top
D3 "DO-216AA" DO-216AA 56.427,-0.039 r90 bottom
D4 "TI_DRY_6_(R-PUSON-N6)" TI_DRY_6_(R-PUSON-N6) 45.999,0.991 r0 bottom
J1 "HEADER_HSEC8_180_EDGE" HEADER_HSEC8_180_EDGE 52.135,-41.024 r0 top
J2 "HDR1X3_2MM" HDR1X3_2MM 56.935,-22.391 r270 top
J3 "HDR1X3_2MM" HDR1X3_2MM 59.475,-22.391 r270 top
J4 "HDR1X3_2MM" HDR1X3_2MM 62.015,-22.391 r270 top
J5 "HDR1X3_2MM" HDR1X3_2MM 64.555,-22.391 r270 top
J6 "HDR1X3_2MM" HDR1X3_2MM 67.095,-22.391 r270 top
J7 "HDR1X3_2MM" HDR1X3_2MM 69.635,-22.391 r270 top
J8 "CONN_USB_MICROAB_FEMALE" CONN_USB_MICROAB_FEMALE 45.466,6.35 r180 top
J9 "DF40C-60DP-0.4V" DF40C-60DP-0.4V 99.125,7.752 r0 bottom
L1 "IND_SMD_VLF3010A_COILS" IND_SMD_VLF3010A_COILS 79.502,-21.59 r270 top
L2 "IND_SMD_VLF3010A_COILS" IND_SMD_VLF3010A_COILS 82.677,-28.575 r0 top
L3 "L0805" L0805 38.647,-5.246 r270 bottom
L4 "L0805" L0805 55.411,-9.182 r270 top
L5 "L0805" L0805 30.646,-17.692 r270 top
L6 "L0805" L0805 52.109,-6.135 r180 bottom
LD1 "LED0805" LED0805 83.294,-17.298 r180 top
LD2 "LED0805" LED0805 61.304,5.179 r90 top
LD3 "LED0805" LED0805 63.844,5.179 r90 top
R1 "R0402" R0402 26.76,-1.487 r0 bottom
R2 "R0402" R0402 26.76,-2.782 r180 bottom
R3 "R0402" R0402 53.633,-21.121 r0 bottom
R4 "R0402" R0402 50.979,-18.111 r0 bottom
R5 "R0402" R0402 48.045,-6.643 r90 top
R6 "R0402" R0402 44.616,-6.516 r90 top
R7 "R0402" R0402 50.979,-21.209 r180 bottom
R8 "R0402" R0402 50.979,-20.092 r180 bottom
R9 "R0402" R0402 44.108,-26.709 r90 top
R10 "R0402" R0402 45.505,-26.709 r90 top
R11 "R0402" R0402 50.331,-14.771 r180 bottom
R12 "R0402" R0402 50.331,-16.041 r180 bottom
R13 "R0402" R0402 59.729,5.676 r90 top
R14 "R0402" R0402 65.444,5.676 r90 top
R15 "R0402" R0402 79.795,-0.42 r90 bottom
R16 "R0402" R0402 78.525,-0.42 r90 bottom
R17 "R0402" R0402 86.272,-0.547 r270 bottom
R18 "R0402" R0402 61.595,-7.62 r0 bottom
R19 "R0603" R0603 61.849,-15.367 r0 bottom
R20 "R0402" R0402 74.676,-20.828 r90 bottom
R21 "R0402" R0402 75.946,-20.828 r90 bottom
R22 "R0402" R0402 74.676,-24.003 r90 bottom
R23 "R0402" R0402 75.946,-24.003 r90 bottom
R24 "R0402" R0402 49.569,-14.009 r270 top
R25 "R0402" R0402 38.354,6.096 r270 bottom
R26 "R0402" R0402 38.735,-1.016 r270 bottom
R27 "R0603" R0603 3.81,-35.306 r90 top
R28 "R0603" R0603 5.461,-35.306 r90 top
R29 "R0603" R0603 7.112,-35.306 r90 top
R30 "R0603" R0603 8.763,-35.306 r90 top
R31 "R0603" R0603 10.414,-35.306 r90 top
R32 "R0603" R0603 12.065,-35.306 r90 top
R33 "R0603" R0603 2.921,-35.306 r90 bottom
R34 "R0603" R0603 4.572,-35.306 r90 bottom
R35 "R0603" R0603 6.223,-35.306 r90 bottom
R36 "R0603" R0603 7.874,-35.306 r90 bottom
R37 "R0603" R0603 9.525,-35.306 r90 bottom
R38 "R0603" R0603 11.176,-35.306 r90 bottom
R39 "R0603" R0603 13.716,-35.306 r90 top
R40 "R0603" R0603 15.367,-35.306 r90 top
R41 "R0603" R0603 17.018,-35.306 r90 top
R42 "R0603" R0603 18.669,-35.306 r90 top
R43 "R0603" R0603 20.32,-35.306 r90 top
R44 "R0603" R0603 21.971,-35.306 r90 top
R45 "R0603" R0603 12.827,-35.306 r90 bottom
R46 "R0603" R0603 14.478,-35.306 r90 bottom
R47 "R0603" R0603 16.129,-35.306 r90 bottom
R48 "R0603" R0603 17.78,-35.306 r90 bottom
R49 "R0603" R0603 19.431,-35.306 r90 bottom
R50 "R0603" R0603 21.082,-35.306 r90 bottom
R51 "R0603" R0603 29.972,-24.257 r0 bottom
R52 "R0603" R0603 36.83,-28.956 r90 bottom
R53 "R0603" R0603 29.972,-21.844 r0 bottom
R54 "R0603" R0603 33.02,-28.956 r90 bottom
R55 "R0402" R0402 34.29,-25.908 r90 bottom
R56 "R0402" R0402 36.83,-25.908 r270 bottom
R57 "R0402" R0402 35.56,-25.908 r90 bottom
R58 "R0402" R0402 33.02,-25.908 r270 bottom
R59 "R0603" R0603 27.686,-31.928 r270 bottom
R60 "R0603" R0603 28.55,-28.981 r180 bottom
R61 "R0603" R0603 28.55,-27.203 r180 bottom
R62 "R0805" R0805 91.352,-21.375 r270 top
R63 "R0402" R0402 80.303,-16.954 r270 bottom
R64 "R0402" R0402 80.862,-24.269 r270 top
R65 "R0402" R0402 79.756,-26.543 r0 top
R66 "R0402" R0402 83.947,-19.507 r270 top
R67 "R0402" R0402 80.093,-17.298 r0 top
R68 "R0402" R0402 84.658,-21.412 r0 top
R69 "R0402" R0402 87.288,-24.599 r90 top
R70 "R0402" R0402 85.217,-19.558 r90 top
R71 "R0603" R0603 87.288,-27.47 r270 top
R72 "R0402" R0402 84.85,-31 r0 top
R73 "R0402" R0402 85.866,-29.959 r0 top
R74 "R0603" R0603 37.809,-6.21 r180 top
R75 "R0603" R0603 30.011,-12.485 r270 bottom
R76 "R0402" R0402 46.394,0.977 r90 top
R77 "R0402" R0402 45.124,0.977 r90 top
R78 "R0402" R0402 55.577,4.24 r90 bottom
R79 "R0402" R0402 43.358,2.819 r180 bottom
R80 "R0402" R0402 43.727,0.977 r270 bottom
R81 "R0402" R0402 53.379,6.311 r0 top
R82 "R0402" R0402 43.727,0.977 r90 top
R83 "R0603" R0603 59.461,-0.914 r90 bottom
R84 "R0603" R0603 57.355,3.859 r90 bottom
R85 "R0603" R0603 51.093,0.85 r90 top
R86 "R0603" R0603 54.014,3.771 r270 top
SW1 "SW_2POS_CTS218" SW_2POS_CTS218 75.272,-22.44 r180 top
SW2 "SWITCH_CAS-D20TA" SWITCH_CAS-D20TA 40.64,-30.48 r0 top
SW3 "SWITCH_CAS-D20TA" SWITCH_CAS-D20TA 33.655,-30.48 r0 top
TP1 "VIA_20_40" VIA_20_40 52.871,-24.677 r0 top
TP2 "VIA_20_40" VIA_20_40 56.743,-12.91 r0 top
TP3 "VIA_20_40" VIA_20_40 64.389,-15.367 r180 top
TP4 "VIA_20_40" VIA_20_40 94.019,-25.439 r0 top
TP5 "VIA_20_40" VIA_20_40 -5.08,-21.59 r270 top
TP6 "VIA_20_40" VIA_20_40 84.342,-33.337 r0 top
TP7 "VIA_20_40" VIA_20_40 -2.54,-21.59 r270 top
U1 "TI_ZWT_337BGA" TI_ZWT_337BGA 40.64,-16.51 r0 top
U2 "SOT-23-6" SOT-23-6 62.574,0.607 r0 top
U3 "SOT-23-6" SOT-23-6 61.087,-6.731 r180 top
U4 "SOT-23-6" SOT-23-6 61.087,-14.097 r180 top
U5 "CONN_SDMICRO-3M-2900" CONN_SDMICRO-3M-2900 78.74,2.413 r0 top
U6 "SOT-23-6" SOT-23-6 3.429,-29.718 r0 top
U7 "SOT-23-6" SOT-23-6 7.112,-29.718 r0 top
U8 "SOT-23-6" SOT-23-6 10.668,-29.718 r0 top
U9 "SOT-23-6" SOT-23-6 14.224,-29.718 r0 top
U10 "SOT-23-6" SOT-23-6 17.78,-29.718 r0 top
U11 "SOT-23-6" SOT-23-6 21.463,-29.718 r0 top
U12 "MSOP8_DGK" MSOP8_DGK 27.305,-29.21 r270 top
U13 "SSOP16_DBQ" SSOP16_DBQ 27.94,-24.13 r270 top
U14 "TI_DRC_10" TI_DRC_10 83.693,-24.257 r0 top
U15 "SOT-23-5" SOT-23-5 56.935,3.771 r90 top
U16 "SC-75" SC-75 51.601,4.152 r0 top
X1 "XTAL_TXC_7B" XTAL_TXC_7B 52.363,-14.517 r270 top

## Footprints (in the part's own frame and the unit in brackets; to place one, negate y for a bottom-side part, rotate by r counter-clockwise, add the part's x,y. Pads: shape width x height; smd on the part's side, far side on the other; paste and mask are expansions set on the pad)
C0402 [mil]
  rect 25x25 smd mask+3: 1(-20,0) 2(20,0)
  silkscreen extent -40,-20 40,20
C0603 [mil]
  rect 43x39 smd mask+3: 1(-33.5,0) 2(33.5,0)
  silkscreen extent -65,-28 65,28
C0805 [mil]
  rect 51x59 smd mask+3: 1(-37.5,0) 2(37.5,0)
  silkscreen extent -78,-45 78,45
C0805P [mil]
  rect 51x59 smd mask+3: 1(-37.5,0) 2(37.5,0)
  silkscreen extent -70,-35 70,35
C1206P [mil]
  rect 63x71 smd mask+3: 1(-55,0) 2(55,0)
  silkscreen extent -95,-45 95,45
C1812 [mil]
  rect 125x45 smd mask+3: 1(0,80) 2(0,-80)
  silkscreen extent -75,-115 75,115
CONN_SDMICRO-3M-2900 [mil]
  rect 32x59 smd mask+2.5: 1(0,0) 2(43,-16) 3(86,0) 4(129,8) 5(172,0) 6(215,8) 7(258,0) 8(301,0)
  rect 55x76 smd mask+3: 9(332.5,112.5) 10(-185.5,151.5)
  rect 76x55 smd mask+3: 11(42,-406) 12(267,-406)
  silkscreen extent -225,-445 370,200
CONN_USB_B_MINI_FEMALE [mil]
  rect 20x80 smd mask+3: 1(-62.99,0) 2(-31.5,0) 3(0,0) 4(31.5,0) 5(62.99,0)
  rect 100x88 smd mask+3: 6(-165.35,-9.84) 7(165.35,-9.84) 8(-165.35,-218.5) 9(165.35,-218.5)
  round 1 hole 36 unplated mask+27: 10(-68.9,-88.58) 11(68.9,-88.58)
  silkscreen extent -152,-343 152,50
CONN_USB_MICROAB_FEMALE [mm]
  rect 0.4x1.35 smd mask+0.025: 1(-1.3,2.7) 2(-0.65,2.7) 3(0,2.7) 4(0.65,2.7) 5(1.3,2.7)
  rect 1.5x1.3 smd mask+0.05: 6(3.3,2.6) 7(-3.3,2.6)
  rect 2.3x1.3 smd mask+0.05: 8(3.75,0) 9(-3.75,0)
  rect 1.9x1.9 smd mask+0.05: 10(-1.2,0) 11(1.2,0)
  silkscreen extent -3.8,-2.2 3.8,-1.37
DF40C-60DP-0.4V [mm]
  rect 0.2x1.14 smd mask+0.1: 1(-71.205,6.4) 2(-71.205,3.76) 3(-70.805,6.4) 4(-70.805,3.76) 5(-70.405,6.4) 6(-70.405,3.76) 7(-70.005,6.4) 8(-70.005,3.76) 9(-69.605,6.4) 10(-69.605,3.76) 11(-69.205,6.4) 12(-69.205,3.76) 13(-68.805,6.4) 14(-68.805,3.76) 15(-68.405,6.4) 16(-68.405,3.76) 17(-68.005,6.4) 18(-68.005,3.76) 19(-67.605,6.4) 20(-67.605,3.76) 21(-67.205,6.4) 22(-67.205,3.76) 23(-66.805,6.4) 24(-66.805,3.76) 25(-66.405,6.4) 26(-66.405,3.76) 27(-66.005,6.4) 28(-66.005,3.76) 29(-65.605,6.4) 30(-65.605,3.76) 31(-65.205,6.4) 32(-65.205,3.76) 33(-64.805,6.4) 34(-64.805,3.76) 35(-64.405,6.4) 36(-64.405,3.76) 37(-64.005,6.4) 38(-64.005,3.76) 39(-63.605,6.4) 40(-63.605,3.76) 41(-63.205,6.4) 42(-63.205,3.76) 43(-62.805,6.4) 44(-62.805,3.76) 45(-62.405,6.4) 46(-62.405,3.76) 47(-62.005,6.4) 48(-62.005,3.76) 49(-61.605,6.4) 50(-61.605,3.76) 51(-61.205,6.4) 52(-61.205,3.76) 53(-60.805,6.4) 54(-60.805,3.76) 55(-60.405,6.4) 56(-60.405,3.76) 57(-60.005,6.4) 58(-60.005,3.76) 59(-59.605,6.4) 60(-59.605,3.76)
  round 0.127 hole 2.489 unplated mask+2.222: 61(-73.66,21.59) 62(-29.21,3.175) 63(-6.35,19.05)
  silkscreen extent -72.71,2.88 -58.1,7.28
DO-216AA [mil]
  rect 100x105 smd mask+3: 1(0,12.5)
  rect 50x40 smd mask+3: 2(0,-90)
  silkscreen extent -60,-120 60,75
HDR1X3_2MM [mil]
  rect 62x62 / inner round 62 / far side rect 62x62 hole 42 mask+3: 1(0,0)
  round 62 hole 42 mask+3: 2(78.74,0) 3(157.48,0)
  silkscreen extent -50,-50 200,50
HEADER_HSEC8_180_EDGE [mm]
  rect 0.5x2.724 smd: 1(-50.4,0) 3(-49.6,0) 5(-48.8,0) 7(-48,0) 9(-47.2,0) 11(-46.4,0) 13(-45.6,0) 15(-44.8,0) 17(-44,0) 19(-43.2,0) 21(-42.4,0) 23(-41.6,0) 25(-40.8,0) 27(-40,0) 29(-39.2,0) 31(-38.4,0) 33(-37.6,0) 35(-36.8,0) 37(-36,0) 39(-35.2,0) 41(-34.4,0) 43(-33.6,0) 45(-32.8,0) 47(-32,0) 49(-31.2,0) 51(-30.4,0) 53(-29.6,0) 55(-28.8,0) 57(-24.8,0) 59(-24,0) 61(-23.2,0) 63(-22.4,0) 65(-21.6,0) 67(-20.8,0) 69(-20,0) 71(-19.2,0) 73(-18.4,0) 75(-17.6,0) 77(-16.8,0) 79(-16,0) 81(-15.2,0) 83(-14.4,0) 85(-13.6,0) 87(-12.8,0) 89(-12,0) 91(-11.2,0) 93(-10.4,0) 95(-9.6,0) 97(-8.8,0) 99(-8,0) 101(-7.2,0) 103(-6.4,0) 105(-5.6,0) 107(-4.8,0) 109(-4,0) 111(-3.2,0) 113(-2.4,0) 115(-1.6,0) 117(-0.8,0) 119(0,0) 121(21.068,0) 123(21.868,0) 125(22.668,0) 127(23.468,0) 129(24.268,0) 131(25.068,0) 133(25.868,0) 135(26.668,0) 137(27.468,0) 139(28.268,0) 141(29.068,0) 143(29.868,0) 145(30.668,0) 147(31.468,0) 149(32.268,0) 151(33.068,0) 153(33.868,0) 155(34.668,0) 157(35.468,0) 159(36.268,0) 161(37.068,0) 163(37.868,0) 165(38.668,0) 167(39.468,0) 169(40.268,0) 171(41.068,0) 173(41.868,0) 175(42.668,0) 177(43.468,0) 179(44.268,0)
  rect 0.5x2.724 smd far side: 2(-50.4,0) 4(-49.6,0) 6(-48.8,0) 8(-48,0) 10(-47.2,0) 12(-46.4,0) 14(-45.6,0) 16(-44.8,0) 18(-44,0) 20(-43.2,0) 22(-42.4,0) 24(-41.599,0) 26(-40.8,0) 28(-40,0) 30(-39.2,0) 32(-38.4,0) 34(-37.598,0) 36(-36.798,0) 38(-35.998,0) 40(-35.198,0) 42(-34.398,0) 44(-33.6,0) 46(-32.798,0) 48(-32,0) 50(-31.198,0) 52(-30.398,0) 54(-29.597,0) 56(-28.8,0) 58(-24.8,0) 60(-24,0) 62(-23.2,0) 64(-22.4,0) 66(-21.6,0) 68(-20.8,0) 70(-20,0) 72(-19.2,0) 74(-18.4,0) 76(-17.599,0) 78(-16.799,0) 80(-15.999,0) 82(-15.199,0) 84(-14.399,0) 86(-13.599,0) 88(-12.799,0) 90(-11.999,0) 92(-11.199,0) 94(-10.399,0) 96(-9.598,0) 98(-8.798,0) 100(-7.998,0) 102(-7.198,0) 104(-6.398,0) 106(-5.598,0) 108(-4.798,0) 110(-3.998,0) 112(-3.198,0) 114(-2.398,0) 116(-1.597,0) 118(-0.797,0) 120(0.003,0) 122(21.068,0) 124(21.868,0) 126(22.668,0) 128(23.468,0) 130(24.268,0) 132(25.068,0) 134(25.869,0) 136(26.669,0) 138(27.469,0) 140(28.269,0) 142(29.069,0) 144(29.869,0) 146(30.669,0) 148(31.469,0) 150(32.269,0) 152(33.069,0) 154(33.87,0) 156(34.67,0) 158(35.47,0) 160(36.27,0) 162(37.07,0) 164(37.87,0) 166(38.67,0) 168(39.47,0) 170(40.27,0) 172(41.07,0) 174(41.871,0) 176(42.671,0) 178(43.471,0) 180(44.271,0)
IND_SMD_VLF3010A_COILS [mil]
  rect 48x26 smd mask+3: 1(0,54.13) 2(0,-54.13)
  silkscreen extent -55,-63 55,63
L0805 [mil]
  rect 51x59 smd mask+3: 1(-37.5,0) 2(37.5,0)
  silkscreen extent -75,-40 75,40
LED0805 [mil]
  rect 51x59 smd mask+3: 1(-37.5,0) 2(37.5,0)
  silkscreen extent -99,-35 70,35
MSOP8_DGK [mil]
  rect 16x40 smd mask+3: 1(-38.4,-90) 2(-12.8,-90) 3(12.8,-90) 4(38.4,-90) 5(38.4,90) 6(12.8,90) 7(-12.8,90) 8(-38.4,90)
  silkscreen extent -60,-60 60,60
OSC_ECS-120-20-30B [mil]
  rect 63x50 smd mask+3: 1(-72.83,-43.3) 2(72.83,-43.3) 3(72.83,43.3) 4(-72.83,43.3)
  silkscreen extent -123,-108 122,92
QFN-64 [mil]
  rect 55x12 smd mask+2: 1(-222.5,147.67) 2(-222.5,127.99) 3(-222.5,108.29) 4(-222.5,88.6) 5(-222.5,68.92) 6(-222.5,49.22) 7(-222.5,29.53) 8(-222.5,9.85) 9(-222.5,-9.85) 10(-222.5,-29.53) 11(-222.5,-49.22) 12(-222.5,-68.92) 13(-222.5,-88.6) 14(-222.5,-108.3) 15(-222.5,-127.99) 16(-222.5,-147.67) 33(222.5,-147.67) 34(222.5,-127.99) 35(222.5,-108.3) 36(222.5,-88.6) 37(222.5,-68.92) 38(222.5,-49.22) 39(222.5,-29.53) 40(222.5,-9.85) 41(222.5,9.85) 42(222.5,29.53) 43(222.5,49.22) 44(222.5,68.92) 45(222.5,88.6) 46(222.5,108.29) 47(222.5,127.99) 48(222.5,147.67)
  rect 12x55 smd mask+2: 17(-147.67,-222.5) 18(-127.99,-222.5) 19(-108.29,-222.5) 20(-88.6,-222.5) 21(-68.92,-222.5) 22(-49.22,-222.5) 23(-29.53,-222.5) 24(-9.85,-222.5) 25(9.85,-222.5) 26(29.53,-222.5) 27(49.22,-222.5) 28(68.92,-222.5) 29(88.6,-222.5) 30(108.29,-222.5) 31(127.99,-222.5) 32(147.67,-222.5) 49(147.67,222.5) 50(127.99,222.5) 51(108.29,222.5) 52(88.6,222.5) 53(68.92,222.5) 54(49.22,222.5) 55(29.53,222.5) 56(9.85,222.5) 57(-9.85,222.5) 58(-29.53,222.5) 59(-49.22,222.5) 60(-68.92,222.5) 61(-88.6,222.5) 62(-108.29,222.5) 63(-127.99,222.5) 64(-147.67,222.5)
  silkscreen extent -221,-197 197,221
R0402 [mil]
  rect 25x25 smd mask+3: 1(-20,0) 2(20,0)
  silkscreen extent -40,-20 40,20
R0603 [mil]
  rect 43x39 smd mask+3: 1(-33.5,0) 2(33.5,0)
  silkscreen extent -67,-31 67,31
R0805 [mil]
  rect 50x60 smd mask+3: 1(-45,0) 2(45,0)
  silkscreen extent -80,-40 80,40
SC-75 [mm]
  rect 0.4x0.8 smd mask+0.05: 1(-0.5,-0.7) 2(0.5,-0.7) 3(0,0.7)
  silkscreen extent -0.89,-1.3 0.89,1.3
SOD882L [mil]
  rrect0% 22x22 smd mask+3: 1(-18,0) 2(18,0)
  silkscreen extent -50,-20 40,20
SOIC-8 [mil]
  rect 65x26 smd mask+3: 1(-100,75) 2(-100,25) 3(-100,-25) 4(-100,-75) 5(100,-75) 6(100,-25) 7(100,25) 8(100,75)
  silkscreen extent -50,-100 50,100
SOT-23-5 [mil]
  rect 27x39 smd mask+3: 1(-37.4,-51) 2(0,-51) 3(37.4,-51) 4(37.4,51) 5(-37.4,51)
  silkscreen extent -62,-28 65,28
SOT-23-6 [mil]
  rect 27x39 smd mask+3.5: 1(-37.4,-51) 2(0,-51) 3(37.4,-51) 4(37.4,51) 5(0,51) 6(-37.4,51)
  silkscreen extent -62,-28 62,28
SOT-553-5 [mil]
  rect 12x30 smd mask+2: 1(19.69,28) 2(0,28) 3(-19.69,28) 4(-19.69,-28) 5(19.69,-28)
  silkscreen extent -36,-25 36,25
SSOP16_DBQ [mil]
  rect 16x65 smd mask+3: 1(-87.5,-120) 2(-62.5,-120) 3(-37.5,-120) 4(-12.5,-120) 5(12.5,-120) 6(37.5,-120) 7(62.5,-120) 8(87.5,-120) 9(87.5,120) 10(62.5,120) 11(37.5,120) 12(12.5,120) 13(-12.5,120) 14(-37.5,120) 15(-62.5,120) 16(-87.5,120)
  silkscreen extent -100,-75 100,75
SW_2POS_CTS218 [mil]
  rect 30x50 smd mask+3: 1(-25,-150) 2(25,-150) 3(25,150) 4(-25,150)
  silkscreen extent -75,-115 75,115
SWITCH_CAS-D20TA [mil]
  rect 30x65 smd mask+3: 1(-68.9,-72.83) 2(0,-72.83) 3(68.9,-72.83) 4(-68.9,72.83) 5(0,72.83) 6(68.9,72.83)
  silkscreen extent -109,-115 109,115
TI_DRC_10 [mm]
  oval 0.8x0.23 smd paste+0 mask+0.076: 1(1.475,-1) 2(1.475,-0.5) 3(1.475,0) 4(1.475,0.5) 5(1.475,1) 6(-1.475,1) 7(-1.475,0.5) 8(-1.475,0) 9(-1.475,-0.5) 10(-1.475,-1)
  round 0 all layers, no hole: 11(0,0) 12(0,0) 13(0,0) 14(0,0)
  rect 0.28x0.8 smd paste-0.15: 15(-0.25,-1.5) 16(0.25,-1.5) 17(0.25,1.5) 18(-0.25,1.5)
  rect 1.651x2.413 / inner round 0.762 / far side rect 1.651x2.413 hole 0.305: 19(0,0)
  round 0.508 hole 0.305: 20(-0.5,0.75) 21(0.5,0.75) 22(-0.5,-0.75) 23(0.5,-0.75)
  silkscreen extent -2.03,-2.03 2.03,2.03
TI_DRY_6_(R-PUSON-N6) [mm]
  rect 0.3x0.49 smd mask+0.04: 1(-0.5,-0.375) 2(0,-0.375) 3(0.5,-0.375) 4(0.5,0.375) 5(0,0.375) 6(-0.5,0.375)
  silkscreen extent -1.21,-0.81 0.84,0.81
TI_ZWT_337BGA [mil]
  round 17 smd mask+3: A1(-283.46,283.46) A2(-251.97,283.46) A3(-220.47,283.46) A4(-188.98,283.46) A5(-157.48,283.46) A6(-125.98,283.46) A7(-94.49,283.46) A8(-62.99,283.46) A9(-31.5,283.46) A10(0,283.46) A11(31.5,283.46) A12(62.99,283.46) A13(94.49,283.46) A14(125.98,283.46) A15(157.48,283.46) A16(188.98,283.46) A17(220.47,283.46) A18(251.97,283.46) A19(283.46,283.46) B1(-283.46,251.97) B2(-251.97,251.97) B3(-220.47,251.97) B4(-188.98,251.97) B5(-157.48,251.97) B6(-125.98,251.97) B7(-94.49,251.97) B8(-62.99,251.97) B9(-31.5,251.97) B10(0,251.97) B11(31.5,251.97) B12(62.99,251.97) B13(94.49,251.97) B14(125.98,251.97) B15(157.48,251.97) B16(188.98,251.97) B17(220.47,251.97) B18(251.97,251.97) B19(283.46,251.97) C1(-283.46,220.47) C2(-251.97,220.47) C3(-220.47,220.47) C4(-188.98,220.47) C5(-157.48,220.47) C6(-125.98,220.47) C7(-94.49,220.47) C8(-62.99,220.47) C9(-31.5,220.47) C10(0,220.47) C11(31.5,220.47) C12(62.99,220.47) C13(94.49,220.47) C14(125.98,220.47) C15(157.48,220.47) C16(188.98,220.47) C17(220.47,220.47) C18(251.97,220.47) C19(283.46,220.47) D1(-283.46,188.98) D2(-251.97,188.98) D3(-220.47,188.98) D4(-188.98,188.98) D5(-157.48,188.98) D6(-125.98,188.98) D7(-94.49,188.98) D8(-62.99,188.98) D9(-31.5,188.98) D10(0,188.98) D11(31.5,188.98) D12(62.99,188.98) D13(94.49,188.98) D14(125.98,188.98) D15(157.48,188.98) D16(188.98,188.98) D17(220.47,188.98) D18(251.97,188.98) D19(283.46,188.98) E1(-283.46,157.48) E2(-251.97,157.48) E3(-220.47,157.48) E4(-188.98,157.48) E5(-157.48,157.48) E6(-125.98,157.48) E7(-94.49,157.48) E8(-62.99,157.48) E9(-31.5,157.48) E10(0,157.48) E11(31.5,157.48) E12(62.99,157.48) E13(94.49,157.48) E14(125.98,157.48) E15(157.48,157.48) E16(188.98,157.48) E17(220.47,157.48) E18(251.97,157.48) E19(283.46,157.48) F1(-283.46,125.98) F2(-251.97,125.98) F3(-220.47,125.98) F4(-188.98,125.98) F5(-157.48,125.98) F6(-125.98,125.98) F7(-94.49,125.98) F8(-62.99,125.98) F9(-31.5,125.98) F10(0,125.98) F11(31.5,125.98) F12(62.99,125.98) F13(94.49,125.98) F14(125.98,125.98) F15(157.48,125.98) F16(188.98,125.98) F17(220.47,125.98) F18(251.97,125.98) F19(283.46,125.98) G1(-283.46,94.49) G2(-251.97,94.49) G3(-220.47,94.49) G4(-188.98,94.49) G5(-157.48,94.49) G6(-125.98,94.49) G14(125.98,94.49) G15(157.48,94.49) G16(188.98,94.49) G17(220.47,94.49) G18(251.97,94.49) G19(283.46,94.49) H1(-283.46,62.99) H2(-251.97,62.99) H3(-220.47,62.99) H4(-188.98,62.99) H5(-157.48,62.99) H6(-125.98,62.99) H8(-62.99,62.99) H9(-31.5,62.99) H10(0,62.99) H11(31.5,62.99) H12(62.99,62.99) H14(125.98,62.99) H15(157.48,62.99) H16(188.98,62.99) H17(220.47,62.99) H18(251.97,62.99) H19(283.46,62.99) J1(-283.46,31.5) J2(-251.97,31.5) J3(-220.47,31.5) J4(-188.98,31.5) J5(-157.48,31.5) J6(-125.98,31.5) J8(-62.99,31.5) J9(-31.5,31.5) J10(0,31.5) J11(31.5,31.5) J12(62.99,31.5) J14(125.98,31.5) J15(157.48,31.5) J16(188.98,31.5) J17(220.47,31.5) J18(251.97,31.5) J19(283.46,31.5) K1(-283.46,0) K2(-251.97,0) K3(-220.47,0) K4(-188.98,0) K5(-157.48,0) K6(-125.98,0) K8(-62.99,0) K9(-31.5,0) K10(0,0) K11(31.5,0) K12(62.99,0) K14(125.98,0) K15(157.48,0) K16(188.98,0) K17(220.47,0) K18(251.97,0) K19(283.46,0) L1(-283.46,-31.5) L2(-251.97,-31.5) L3(-220.47,-31.5) L4(-188.98,-31.5) L5(-157.48,-31.5) L6(-125.98,-31.5) L8(-62.99,-31.5) L9(-31.5,-31.5) L10(0,-31.5) L11(31.5,-31.5) L12(62.99,-31.5) L14(125.98,-31.5) L15(157.48,-31.5) L16(188.98,-31.5) L17(220.47,-31.5) L18(251.97,-31.5) L19(283.46,-31.5) M1(-283.46,-62.99) M2(-251.97,-62.99) M3(-220.47,-62.99) M4(-188.98,-62.99) M5(-157.48,-62.99) M6(-125.98,-62.99) M8(-62.99,-62.99) M9(-31.5,-62.99) M10(0,-62.99) M11(31.5,-62.99) M12(62.99,-62.99) M14(125.98,-62.99) M15(157.48,-62.99) M16(188.98,-62.99) M17(220.47,-62.99) M18(251.97,-62.99) M19(283.46,-62.99) N1(-283.46,-94.49) N2(-251.97,-94.49) N3(-220.47,-94.49) N4(-188.98,-94.49) N5(-157.48,-94.49) N6(-125.98,-94.49) N14(125.98,-94.49) N15(157.48,-94.49) N16(188.98,-94.49) N17(220.47,-94.49) N18(251.97,-94.49) N19(283.46,-94.49) P1(-283.46,-125.98) P2(-251.97,-125.98) P3(-220.47,-125.98) P4(-188.98,-125.98) P5(-157.48,-125.98) P6(-125.98,-125.98) P7(-94.49,-125.98) P8(-62.99,-125.98) P9(-31.5,-125.98) P10(0,-125.98) P11(31.5,-125.98) P12(62.99,-125.98) P13(94.49,-125.98) P14(125.98,-125.98) P15(157.48,-125.98) P16(188.98,-125.98) P17(220.47,-125.98) P18(251.97,-125.98) P19(283.46,-125.98) R1(-283.46,-157.48) R2(-251.97,-157.48) R3(-220.47,-157.48) R4(-188.98,-157.48) R5(-157.48,-157.48) R6(-125.98,-157.48) R7(-94.49,-157.48) R8(-62.99,-157.48) R9(-31.5,-157.48) R10(0,-157.48) R11(31.5,-157.48) R12(62.99,-157.48) R13(94.49,-157.48) R14(125.98,-157.48) R15(157.48,-157.48) R16(188.98,-157.48) R17(220.47,-157.48) R18(251.97,-157.48) R19(283.46,-157.48) T1(-283.46,-188.98) T2(-251.97,-188.98) T3(-220.47,-188.98) T4(-188.98,-188.98) T5(-157.48,-188.98) T6(-125.98,-188.98) T7(-94.49,-188.98) T8(-62.99,-188.98) T9(-31.5,-188.98) T10(0,-188.98) T11(31.5,-188.98) T12(62.99,-188.98) T13(94.49,-188.98) T14(125.98,-188.98) T15(157.48,-188.98) T16(188.98,-188.98) T17(220.47,-188.98) T18(251.97,-188.98) T19(283.46,-188.98) U1(-283.46,-220.47) U2(-251.97,-220.47) U3(-220.47,-220.47) U4(-188.98,-220.47) U5(-157.48,-220.47) U6(-125.98,-220.47) U7(-94.49,-220.47) U8(-62.99,-220.47) U9(-31.5,-220.47) U10(0,-220.47) U11(31.5,-220.47) U12(62.99,-220.47) U13(94.49,-220.47) U14(125.98,-220.47) U15(157.48,-220.47) U16(188.98,-220.47) U17(220.47,-220.47) U18(251.97,-220.47) U19(283.46,-220.47) V1(-283.46,-251.97) V2(-251.97,-251.97) V3(-220.47,-251.97) V4(-188.98,-251.97) V5(-157.48,-251.97) V6(-125.98,-251.97) V7(-94.49,-251.97) V8(-62.99,-251.97) V9(-31.5,-251.97) V10(0,-251.97) V11(31.5,-251.97) V12(62.99,-251.97) V13(94.49,-251.97) V14(125.98,-251.97) V15(157.48,-251.97) V16(188.98,-251.97) V17(220.47,-251.97) V18(251.97,-251.97) V19(283.46,-251.97) W1(-283.46,-283.46) W2(-251.97,-283.46) W3(-220.47,-283.46) W4(-188.98,-283.46) W5(-157.48,-283.46) W6(-125.98,-283.46) W7(-94.49,-283.46) W8(-62.99,-283.46) W9(-31.5,-283.46) W10(0,-283.46) W11(31.5,-283.46) W12(62.99,-283.46) W13(94.49,-283.46) W14(125.98,-283.46) W15(157.48,-283.46) W16(188.98,-283.46) W17(220.47,-283.46) W18(251.97,-283.46) W19(283.46,-283.46)
  silkscreen extent -307,-307 307,307
TSSOP20_PW [mil]
  rect 65x15 smd mask+3: 1(-110,115.16) 2(-110,89.57) 3(-110,63.98) 4(-110,38.39) 5(-110,12.8) 6(-110,-12.8) 7(-110,-38.39) 8(-110,-63.98) 9(-110,-89.57) 10(-110,-115.16) 11(110,-115.16) 12(110,-89.57) 13(110,-63.98) 14(110,-38.39) 15(110,-12.8) 16(110,12.8) 17(110,38.39) 18(110,63.98) 19(110,89.57) 20(110,115.16)
  silkscreen extent -89,-130 89,130
VIA_20_40 [mil]
  round 40 hole 20 mask+3: 1(0,0)
XTAL_TXC_7B [mm]
  rect 1.6x1.27 smd mask+0.076: 1(-2,-1.2) 2(2,-1.2) 3(2,1.2) 4(-2,1.2)
  silkscreen extent -3.53,-2.1 3.1,2.1

## Via types
v1: diameter 0.457, hole 0.203, Primary Side to Secondary Side, 1025 vias
v2: diameter 0.711, hole 0.254, Primary Side to Secondary Side, 7 vias

## Nets (pads, with @x,y where several pads share a name; then routed paths per layer and width w, separated by ;. In a path a pad name is that pad's centre, name@x,y a point inside that pad or via, vN(x,y) a via of type N, cw(c..) or ccw(c..) an arc to the next point about the centre after c; other vN are vias at no path point)
1: A:C1.1 A:C2.1 A:C3.2 A:C4.1 A:C5.1 A:C6.1 A:C7.1 A:C8.1 A:C9.1 A:C10.1 A:C11.1 A:C12.1 A:C13.1 A:C14.1 A:C15.1 A:C16.1 A:C18.1 A:C19.1 A:C20.1 A:C22.1 A:C25.1 A:C27.1 A:C31.2 A:D2.1 A:J1.4 A:R6.1 A:R9.2 A:R10.2 A:R13.2 A:R14.2 A:TP2.1 A:U1.2 A:U2.4 A:U4.1 A:U4.5 A:U4.10 A:U4.11 A:U4.13 A:U4.15 A:U4.25 A:U4.35 A:U4.47 A:U4.51 A:U5.5 A:U5.7 A:U6.4 A:U7.4 A:U8.5 A:U10.3 A:U10.4 A:X1.2 A:X1.4 | length 69.2
  Primary Side w0.203: A:U6.4@16.759,1.623 A:U6.4@17.094,1.623
  Primary Side w0.254: A:C5.1@-3.848,-13.31 -3.702,-13.31 v1(-3.702,-14.694) -3.679,-14.717 A:C7.1@-2.869,-14.717 ; v1(-1.264,-10.833) -1.219,-10.878 -0.756,-10.878 A:C12.1@-0.451,-11.183 ; A:R13.2@0.57,-9.381 1.246,-9.381 v1(1.276,-9.411) ; v1(0.666,0.952) v1@0.669,0.95 ; A:C8.1@3.347,-7.017 4.076,-7.017 v1(4.121,-6.973) ; A:R6.1@6.356,-4.229 7.575,-4.128 v1(7.575,-4.026) A:C6.1@7.575,-4.737 ; v1(6.966,-9.411) 6.981,-9.426 A:U5.7@8.149,-9.426 ; A:U5.5@8.149,-11.966 9.491,-11.966 v1(9.506,-11.951) ; A:C2.1@8.631,1.026 8.631,0.038 v1(8.693,0.038) ; A:R14.2@9.082,-16.251 9.082,-15.404 v1(9.093,-15.392) ; A:U1.2@11.425,0.328 A:C1.1@11.425,-0.917 12.31,-0.917 v1(12.35,-0.877) ; v1(12.046,-6.465) 12.057,-6.476 A:C9.1@12.057,-7.575 ; A:C3.2@12.124,-2.695 13.153,-2.695 v1(13.163,-2.705) ; A:R9.2@12.279,-14.887 12.977,-14.887 v1(12.979,-14.884) ; A:C10.1@12.279,-13.617 12.977,-13.617 v1(12.979,-13.614) ; v1(12.96,1.663) 13.001,1.623 A:C4.1@13.711,1.623 ; v1(14.179,-7.277) A:C27.1@14.179,-6.465 ; v1(16.211,-5.245) 16.211,-4.473 A:U7.4@16.759,-4.473 ; A:U10.4@16.637,-10.315 16.627,-10.325 v1(15.398,-10.325) 15.398,-9.309 15.602,-9.106 16.576,-9.106 A:U10.3@16.637,-9.045
  Primary Side w0.305: A:C11.1@4.129,-16.251 4.129,-15.251 v1(4.14,-15.24) ; v1(17.094,0.66) A:U6.4@17.094,1.623
  Primary Side w0.508: v1@0.669,0.95 A:J1.4@2.25,0.95
  Primary Side w0.635: v2(13.366,6.54) 13.394,6.513 A:D2.1@13.394,5.179
  Secondary Side w0.203: A:C20.1@15.235,3.02 15.395,3.053 15.806,3.053 15.933,3.18 15.933,3.561 16.408,4.036 A:C31.2@17.018,4.14 ; A:C31.2@16.942,4.036 A:C31.2@17.018,4.14 ; A:C31.2@17.094,4.036 A:C31.2@17.018,4.14 ; A:C31.2@17.292,4.31 A:C31.2@17.018,4.14
  Secondary Side w0.254: v1(-5.531,-1.486) -4.402,-1.486 A:X1.2@-4.402,-1.452 ; v1(-4.515,0.343) -3.81,0.343 A:C19.1@-3.81,0.381 ; v1(-4.109,1.663) -4.109,1.659 A:U2.4@-3.251,1.659 ; A:C18.1@-2.794,-7.239 -2.013,-7.239 v1(-1.975,-7.277) ; A:X1.4@-2.202,-5.152 -1.171,-5.152 v1(-1.162,-5.144) ; v1(-0.959,-13.678) -0.937,-13.701 A:U4.51@0.195,-13.701 ; v1(1.378,-5.753) 2.096,-5.753 A:U4.1@2.096,-5.299 ; A:U4.47@2.596,-16.602 v1(2.597,-14.999) v1(2.597,-14.999) ; A:C13.1@3.487,-1.43 4.142,-0.775 4.934,-0.775 v1(4.934,-0.877) ; A:U4.5@4.096,-5.299 4.096,-6.973 v1(4.121,-6.973) ; A:C14.1@4.884,-2.027 4.884,-1.385 v1(4.934,-1.385) ; v1(6.051,-1.791) 6.063,-1.802 A:C16.1@6.063,-2.472 ; v1(6.458,-0.978) 7.439,-0.978 A:C15.1@7.439,-0.767 ; A:U4.10@6.597,-5.299 6.597,-6.16 6.458,-6.299 v1(6.458,-6.668) 6.792,-6.668 7.097,-6.363 A:U4.11@7.097,-5.299 ; A:U4.13@8.097,-5.299 8.097,-4.317 v1(8.49,-3.925) ; A:U4.35@8.597,-16.602 8.597,-15.646 8.851,-15.392 v1(9.093,-15.392) ; A:U4.15@9.098,-5.299 9.098,-6.363 9.402,-6.668 v1(9.709,-6.668) ; A:U4.25@11.498,-11.2 12.673,-11.2 v1(12.675,-11.201) ; v1(14.179,-7.277) A:C25.1@14.179,-6.465 ; A:C22.1@15.235,-3.076 15.906,-3.076 16.211,-3.381 v1(16.211,-5.245) ; v1(15.398,-10.325) 15.409,-10.315 A:U8.5@16.632,-10.315
  Secondary Side w0.508: v1(0.666,0.952) 1.639,0.952 2.089,1.402 A:R10.2@2.979,1.402 ; A:C31.2@16.942,4.036 v1(16.942,6.477) ; v1(17.094,0.66) A:C31.2@17.094,4.036
$$$723: R66.2 R68.1 | length 1.7
  Primary Side w0.135: R66.2@83.947,-19.787 R66.2@83.947,-20.015 83.947,-20.625 84.15,-20.828 R68.1@84.15,-21.412
$$$2265: R55.1 SW2.2 | length 11.2
  Primary Side w0.135: v1(40.59,-30.925) 40.64,-30.975 SW2.2@40.64,-32.33
  Inner Layer 3 w0.14: v1(34.494,-29.426) 36.475,-29.426 37.466,-30.417 40.082,-30.417 v1(40.59,-30.925)
  Secondary Side w0.135: R55.1@34.29,-26.416 34.29,-27.852 34.494,-28.056 v1(34.494,-29.426)
$$$2266: R56.1 SW2.5 | length 8.9
  Primary Side w0.135: SW2.5@40.64,-28.63 40.64,-29.832 v1(40.717,-29.909)
  Secondary Side w0.135: R56.1@36.83,-25.4 37.542,-25.4 38.431,-26.289 40.145,-26.289 40.717,-26.861 v1(40.717,-29.909)
$$$2267: R57.1 SW3.2 | length 8
  Primary Side w0.135: SW3.2@33.655,-32.33 33.655,-30.341 33.909,-30.087 34.164,-30.087 34.265,-30.087 v1(34.291,-30.112)
  Secondary Side w0.135: v1@34.292,-30.111 34.341,-30.111 34.341,-30.175 34.646,-30.48 35.154,-30.48 35.56,-30.074 R57.1@35.56,-26.416
$$$2268: R58.1 SW3.5 | length 3.5
  Primary Side w0.135: v1(33.63,-27.127) 33.655,-27.153 SW3.5@33.655,-28.63
  Secondary Side w0.135: R58.1@33.02,-25.4 33.63,-26.01 v1(33.63,-27.127)
$$$3593: R63.2 U14.4 | length 11.5
  Primary Side w0.254: U14.4@85.168,-23.757 85.852,-23.757 86.106,-23.503 86.106,-23.114 85.852,-22.86 v1(85.852,-21.844)
  Secondary Side w0.254: R63.2@80.303,-17.462 83.822,-17.462 84.663,-18.303 84.663,-20.655 v1(85.852,-21.844)
$$$4026: C45.2 U12.5 | length 2
  Primary Side w0.135: U12.5@29.591,-30.185 30.521,-30.185 v1(30.531,-30.175)
  Secondary Side w0.135: C45.2@29.591,-30.48 30.201,-30.48 30.505,-30.175 v1(30.531,-30.175)
$$$4581: LD1.2 R67.2 | length 1.7
  Primary Side w0.508: R67.2@80.601,-17.298 LD1.2@82.341,-17.298
$$$4984: L1.1 U14.6 | length 2.8
  Primary Side w0.254: L1.1@80.877,-21.59 81.814,-21.59 82.31,-22.085 82.31,-23.165 U14.6@82.218,-23.257
$$$5084: R69.1 R71.1 U14.2 | length 3.8
  Primary Side w0.254: U14.2@85.168,-24.757 86.107,-24.757 86.437,-25.087 87.268,-25.087 R69.1@87.288,-25.107
  Primary Side w0.508: R71.1@87.288,-26.619 R69.1@87.288,-25.107
$$$5419: R68.2 R70.1 U14.5 | length 3.2
  Primary Side w0.135: U14.5@85.168,-23.257 85.168,-21.414 R68.2@85.166,-21.412 85.217,-21.361 R70.1@85.217,-20.066
$$$5918: C67.2 R65.2 U14.9 | length 4.7
  Primary Side w0.254: C67.2@80.264,-27.813 R65.2@80.264,-26.543 81.184,-26.543 81.502,-26.225 81.502,-24.904 81.649,-24.757 U14.9@82.218,-24.757
$$$6116: C69.1 R72.2 R73.1 U14.1 | length 7.1
  Primary Side w0.254: U14.1@85.168,-25.257 85.358,-25.257 R73.1@85.358,-29.959 R72.2@85.358,-31 85.358,-30.911 C69.1@85.358,-31.991
$$$6167: L2.1 U14.10 | length 2.1
  Primary Side w0.305: U14.10@82.218,-25.257 82.218,-26.098 82.677,-26.557 L2.1@82.677,-27.2
$$$10463: J1.1 R1.2 | length 69.6
  Primary Side w0.135: v1(0.42,-34.837) 0.42,-35.716 1.735,-37.031 J1.1@1.735,-41.024
  Inner Layer 8 w0.14: v1(0.42,-34.837) 0.42,-34.374 -0.304,-33.65 -0.304,-23.215 1.918,-20.992 20.219,-20.992 20.815,-20.396 20.815,-8.103 21.653,-7.264 24.83,-7.264 25.896,-6.198 25.896,-1.028 25.388,-0.52 v1(24.372,-0.52)
  Secondary Side w0.135: v1(24.372,-0.52) 26.887,-0.52 27.268,-0.901 R1.2@27.268,-1.487